# Altium PCB PDC.PcbDoc (part 1 of 3)
Units mil, origin at the board's own origin, x right, y up, seen from the top; angles counter-clockwise.
Board outline 5200.04 x 5000 mil, 4 copper layers (Top Layer, Signal Layer 1, Signal Layer 2, Bottom Layer), stack 30.634 mil thick; 172 components, 174 nets, 838 pads, 390 vias.
Unrouted connection lines stored in the file: 157.
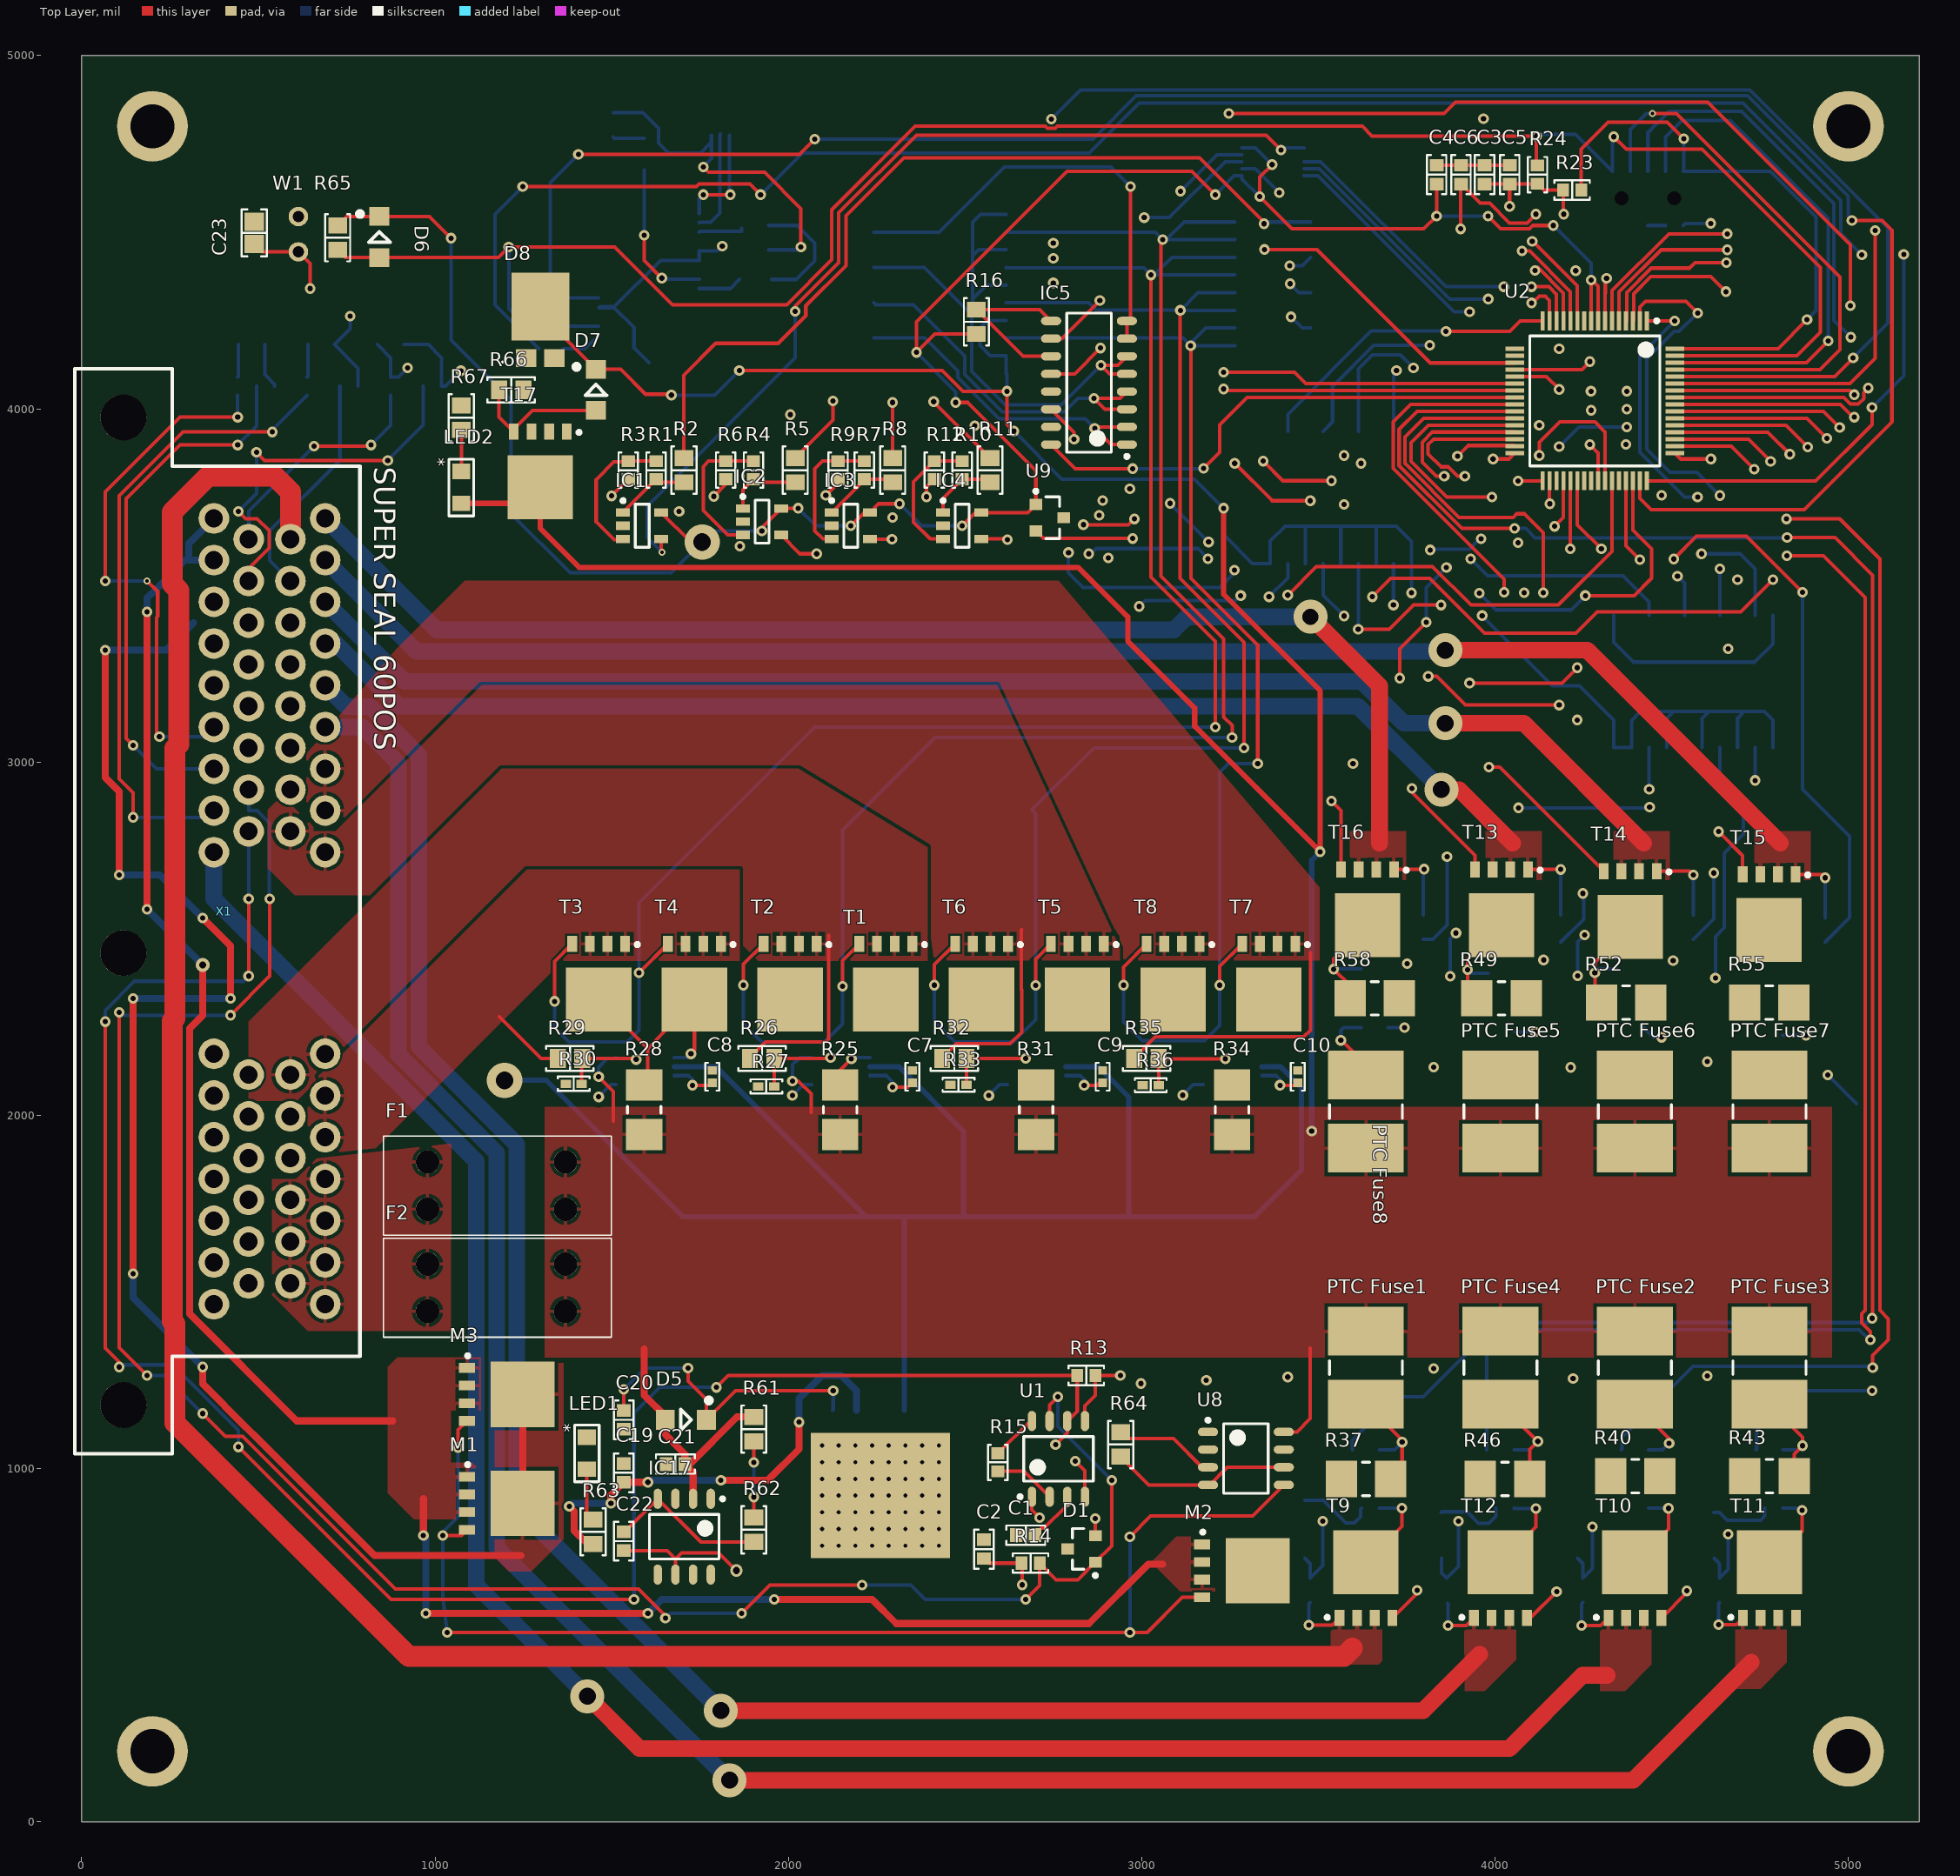
[diagram p0: Top Layer view]
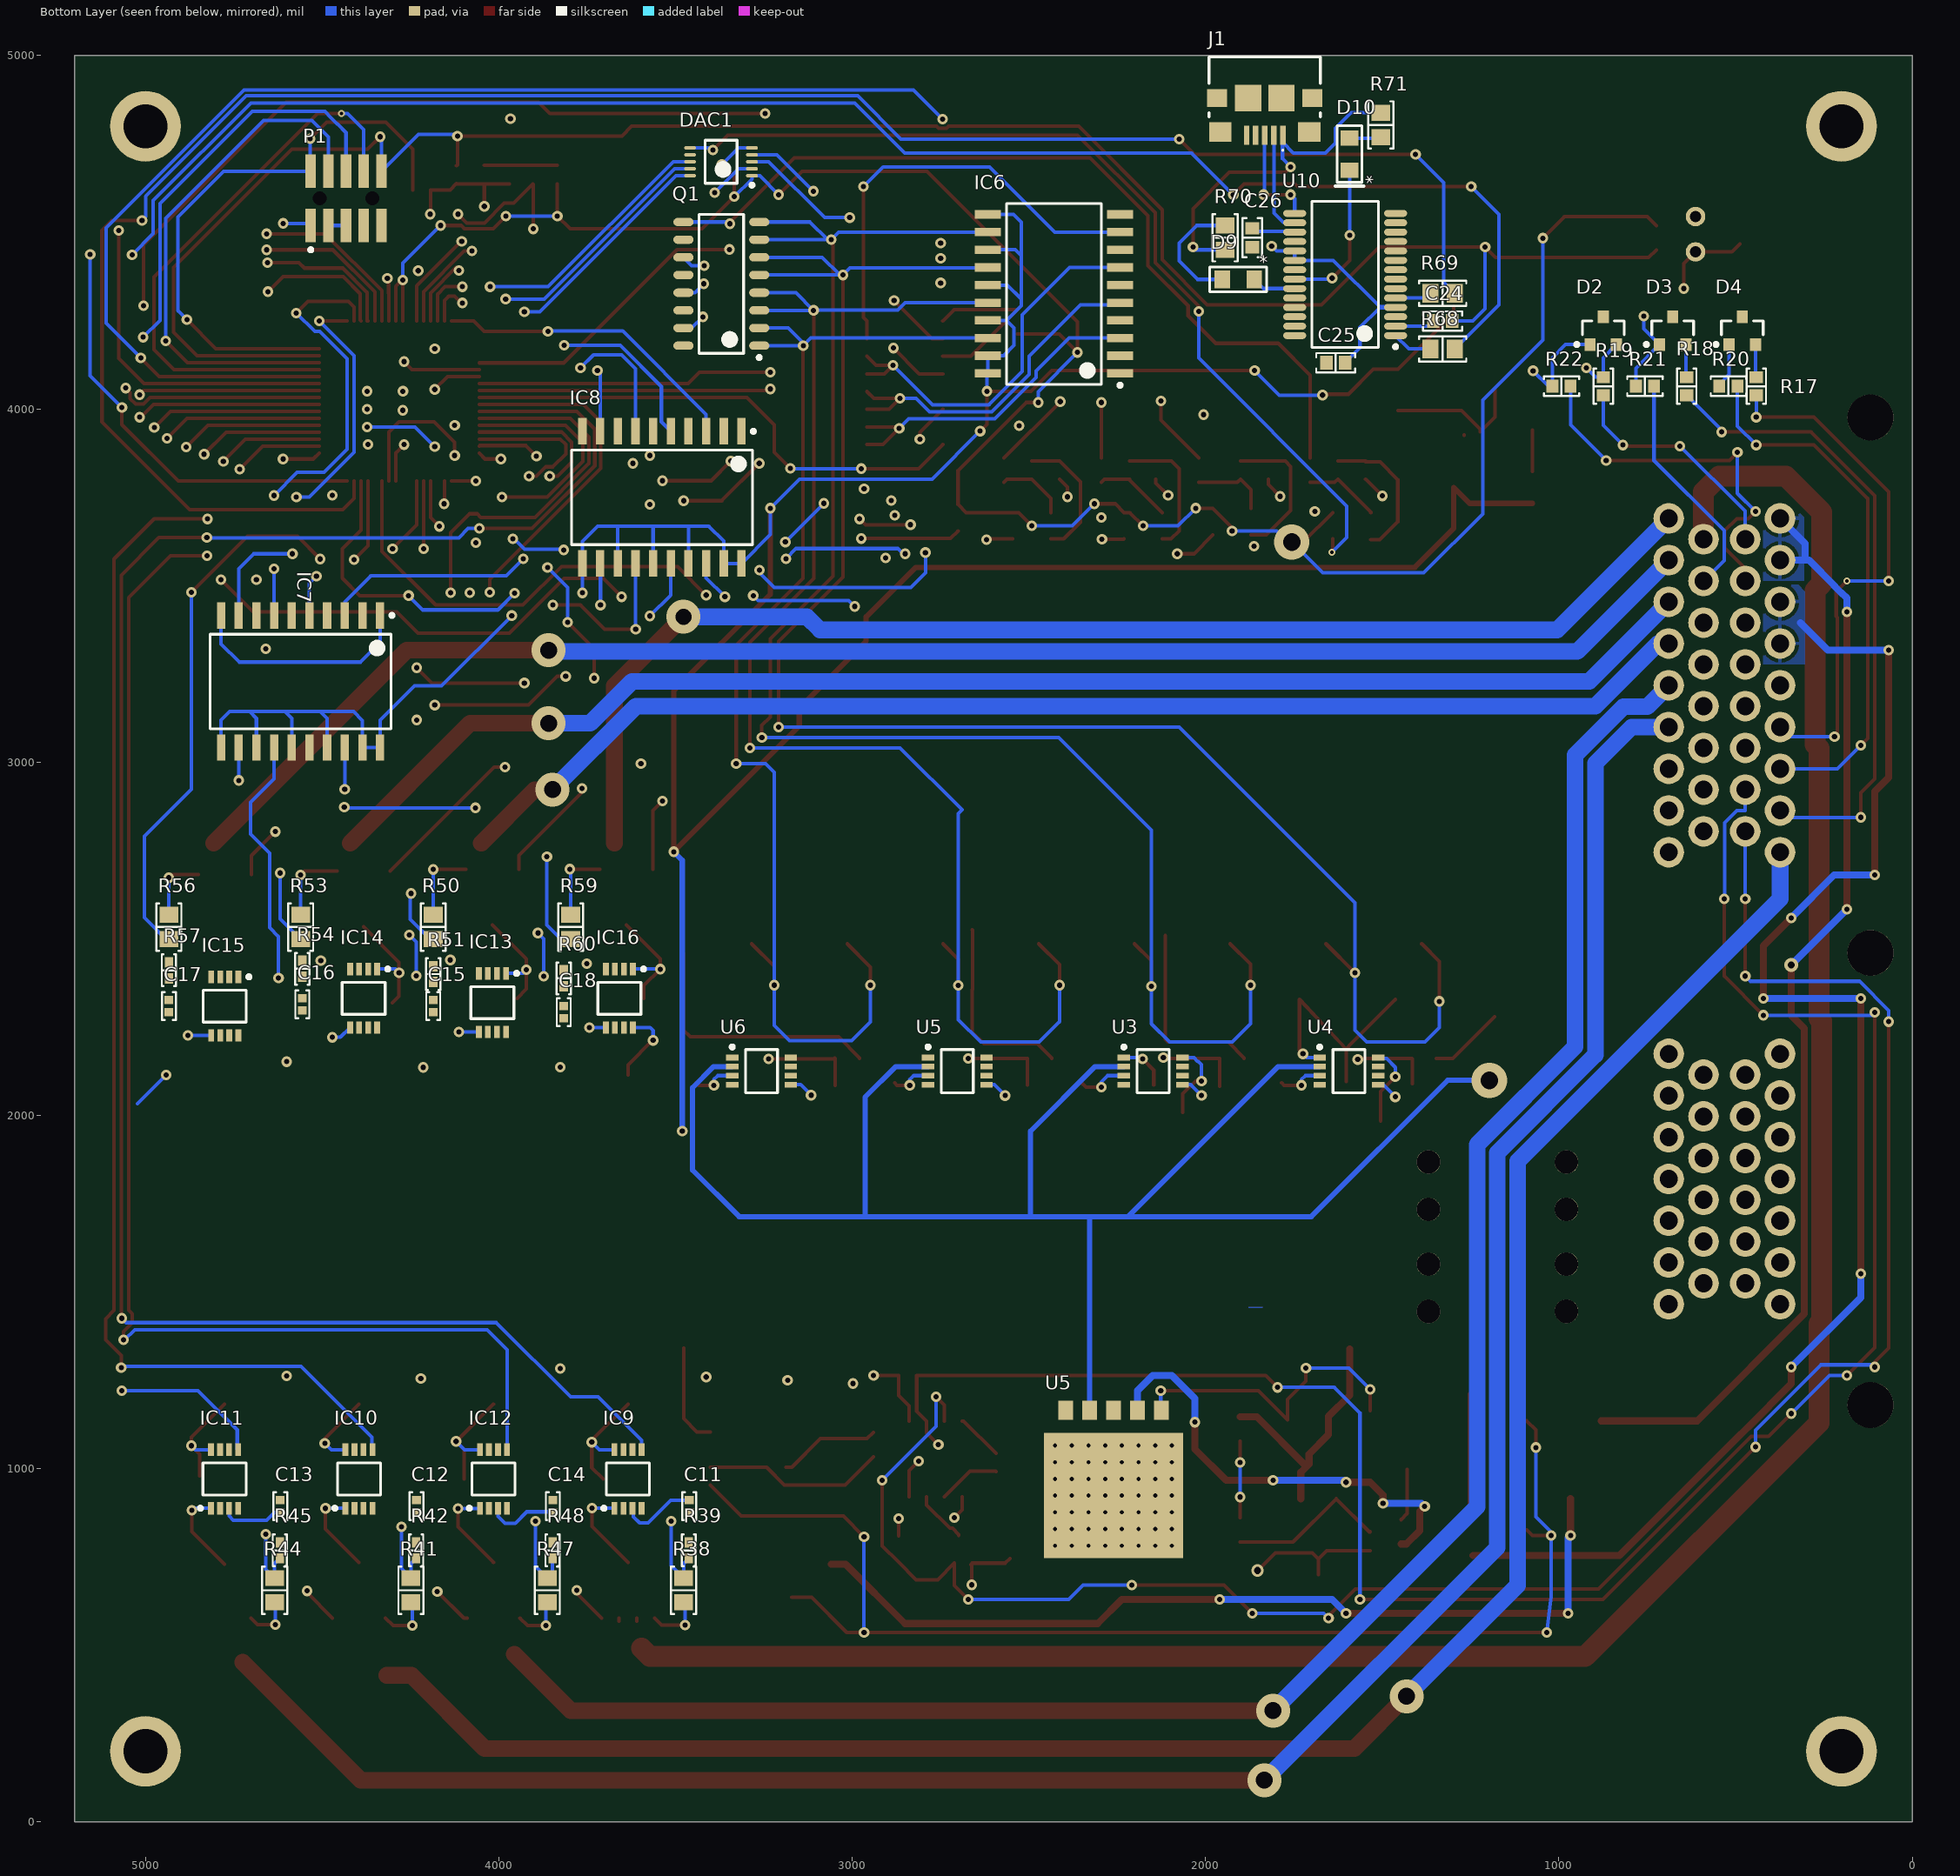
[diagram p1: Bottom Layer view, seen from below]
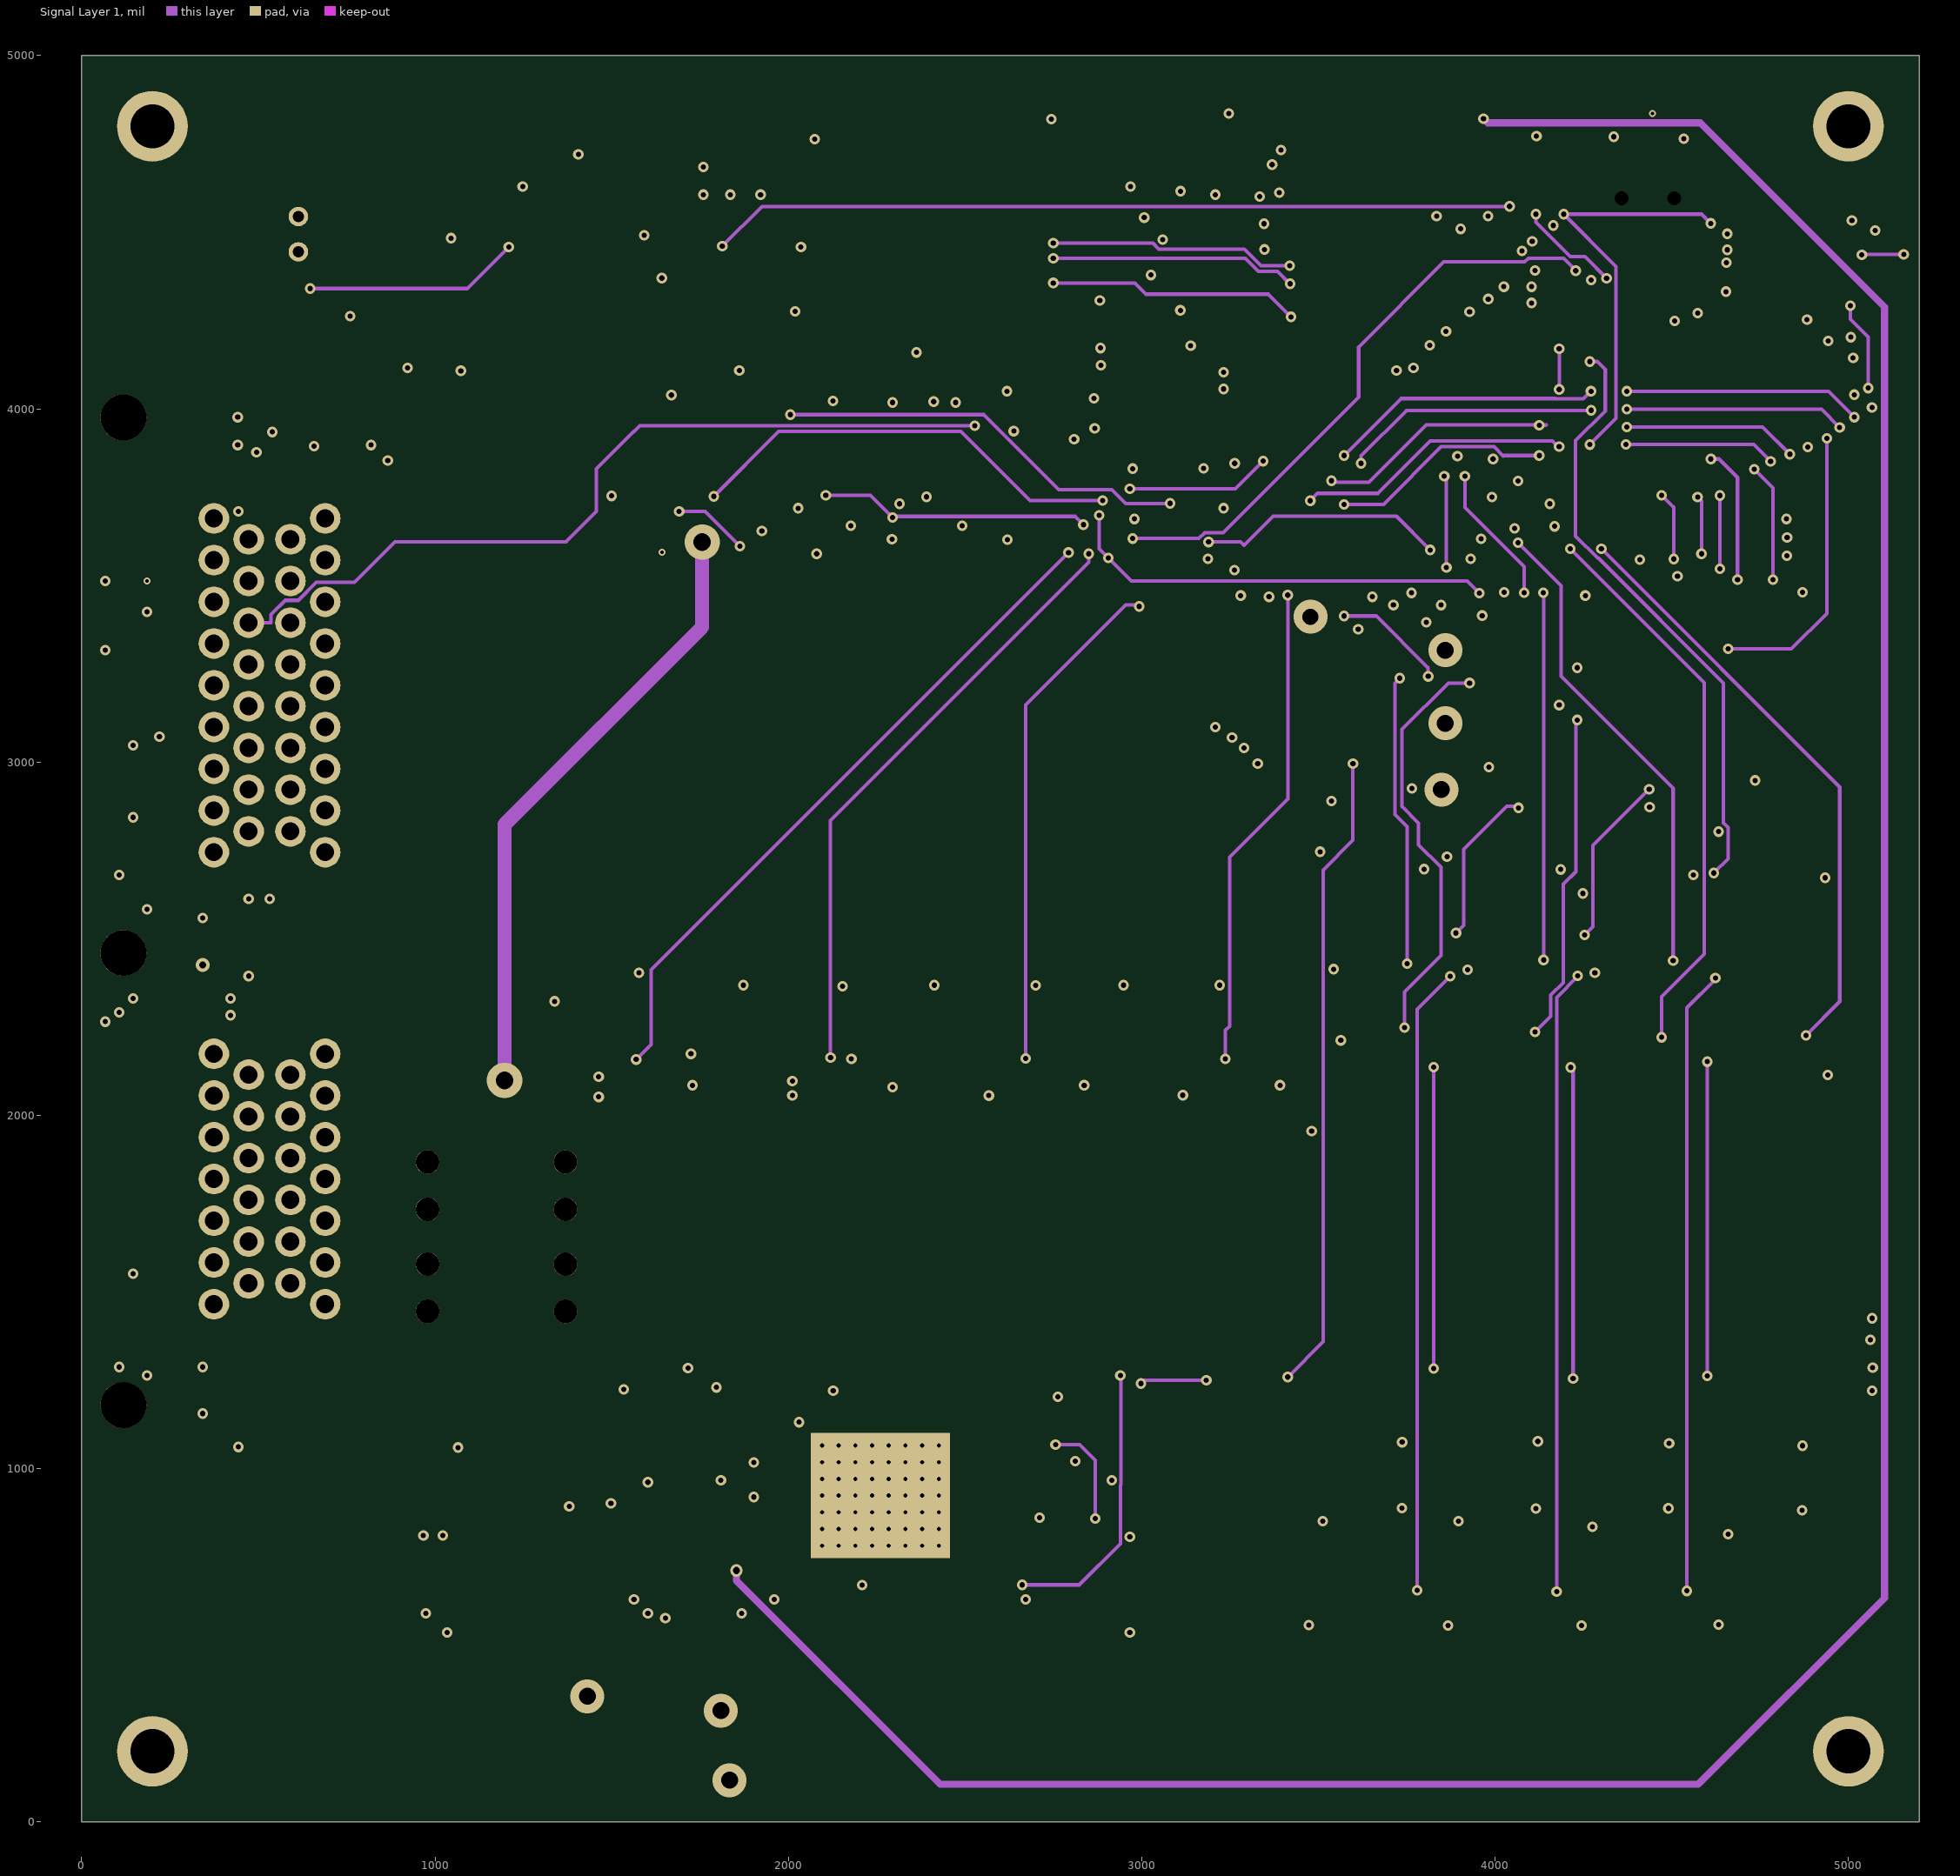
[diagram p2: Signal Layer 1]
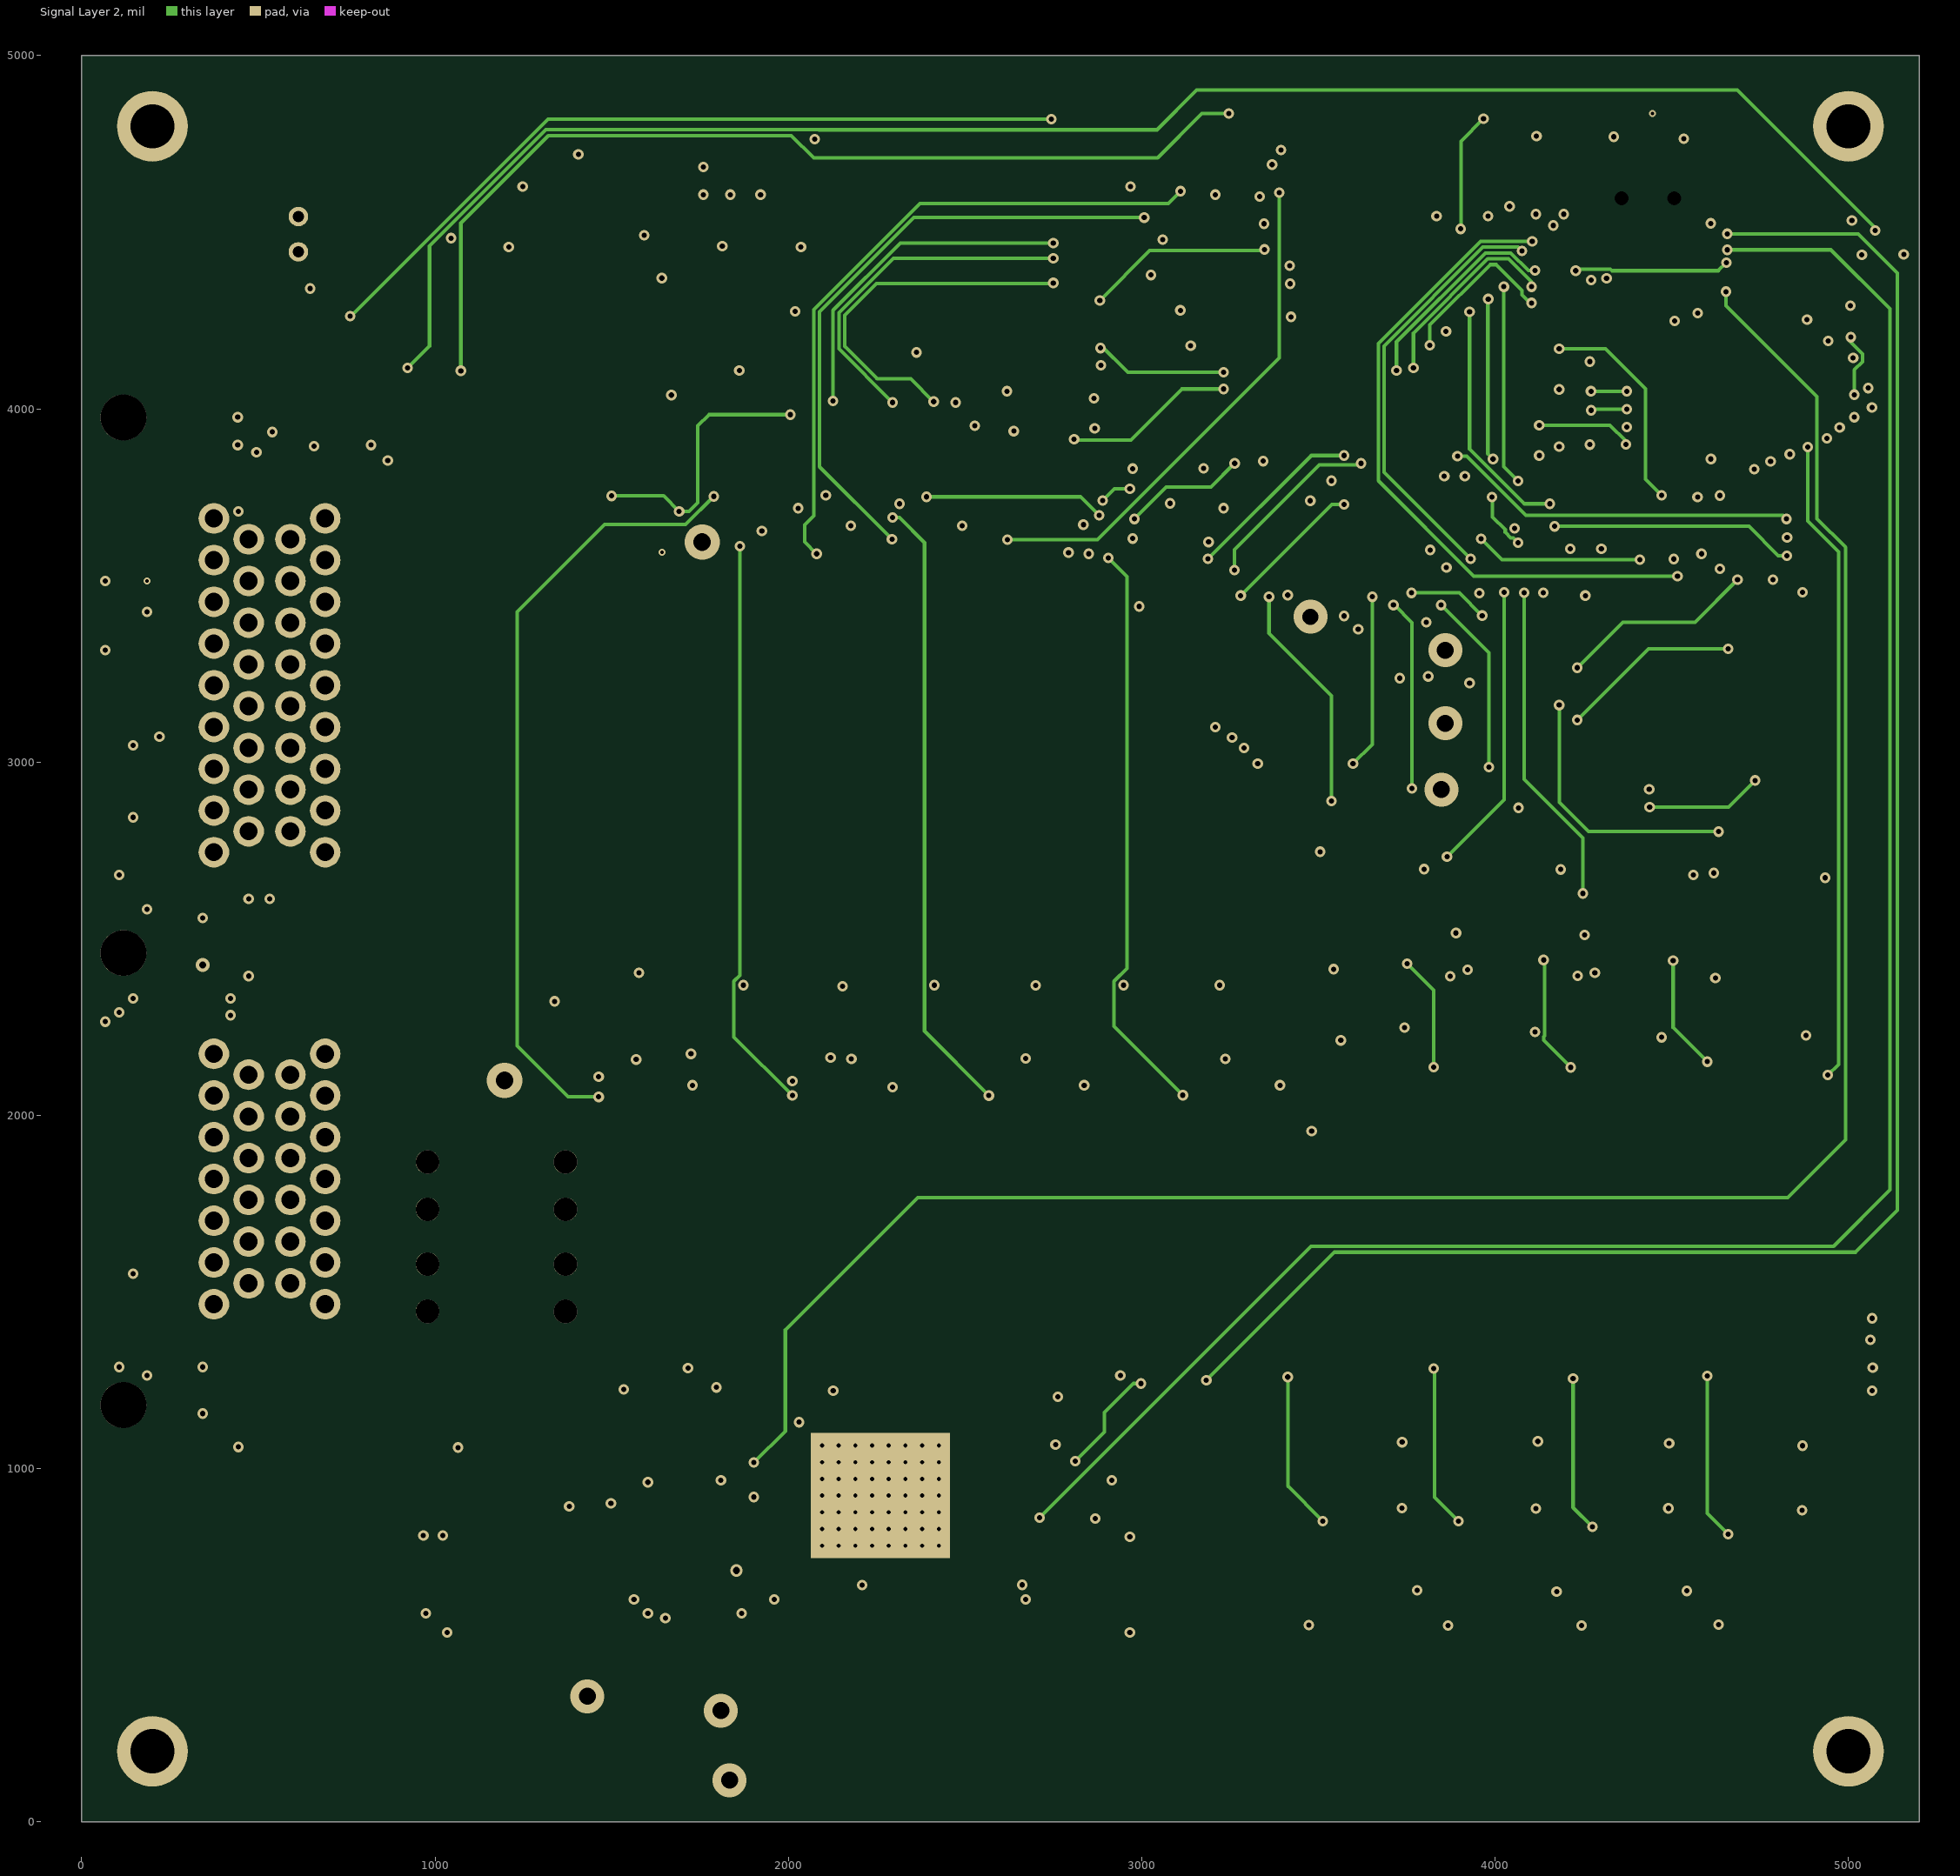
[diagram p3: Signal Layer 2]

## Layer stack, top to bottom
Top Solder: solder mask 0.4, Solder Resist, Dk 3.5
Top Layer: signal copper 1.4
Dielectric 1: core 10, FR-4, Dk 4.2
Signal Layer 1: signal copper 1.417
Dielectric 3: prepreg 5, Dk 4.2
Signal Layer 2: signal copper 1.417
Dielectric 2: core 10, Dk 4.2
Bottom Layer: signal copper 1.4
Bottom Solder: solder mask 0.4, Solder Resist, Dk 3.5

## Board outline
0,0 5200.04,0 5200.04,5000 0,5000

## Design rules (kind name [scope] priority, off if disabled: settings)
Clearance [All] p1: gap=6.5 ignorepadtopadclearanceinfootprint=FALSE except(10: Poly-Poly Poly-Hole)
Height [All] p1: minheight=0 maxheight=3937.01 prefheight=1968.5
PolygonConnect [All] p1: connectstyle=Relief reliefconductorwidth=10 reliefentries=4 polygonreliefangle="90 Angle" airgapwidth=10
RoutingVias [All] p1: holewidth=15 width=30 viastyle="Through Hole" minholewidth=15 minwidth=30 maxholewidth=15 maxwidth=30
SolderMaskExpansion [All] p1: expansion=4
Width [All] p1: maxlimit=787.4 minlimit=10 preferedwidth=10
29 further rules are at their usual default settings.

## Classes and differential pairs
channel class PDC_Low_Current_Outputs: U_PDC_Low_Current_Outputs1 U_PDC_Low_Current_Outputs2 U_PDC_Low_Current_Outputs3 U_PDC_Low_Current_Outputs4 U_PDC_Low_Current_Outputs5 U_PDC_Low_Current_Outputs6 U_PDC_Low_Current_Outputs7 U_PDC_Low_Current_Outputs8
channel class PDC_high_Current_Outputs: U_PDC_high_Current_Outputs1 U_PDC_high_Current_Outputs2 U_PDC_high_Current_Outputs3 U_PDC_high_Current_Outputs4
channel class PDC_Gate_Driver: U_PDC_Gate_Driver1 U_PDC_Gate_Driver2
channel class Analog_HC_Overcurrent_Redundancy: U_Analog_HC_Overcurrent_Redundancy1 U_Analog_HC_Overcurrent_Redundancy2 U_Analog_HC_Overcurrent_Redundancy3 U_Analog_HC_Overcurrent_Redundancy4
component class U_USB: C24 C25 C26 D9 D10 J1 R68 R69 R70 R71 U10
component class U_Temperature_Sensing: U9
component class U_RVP_OVP_HC: D7 D8 LED2 R66 R67 T17
component class U_Reset_Pin: C23 D6 R65 W1
component class U_Rectifier_shutdown_LT1910: R64 U8
component class U_Rectifier_shutdown_Gate: M1 M2 M3
component class U_Power_supply: C19 C20 C21 C22 D5 IC17 LED1 R61 R62 R63 U5
component class U_PDC_Low_Current_Outputs8: C18 IC16 "PTC Fuse8" R58 R59 R60 T16
component class U_PDC_Low_Current_Outputs7: C17 IC15 "PTC Fuse7" R55 R56 R57 T15
component class U_PDC_Low_Current_Outputs6: C16 IC14 "PTC Fuse6" R52 R53 R54 T14
component class U_PDC_Low_Current_Outputs5: C15 IC13 "PTC Fuse5" R49 R50 R51 T13
component class U_PDC_Low_Current_Outputs4: C14 IC12 "PTC Fuse4" R46 R47 R48 T12
component class U_PDC_Low_Current_Outputs3: C13 IC11 "PTC Fuse3" R43 R44 R45 T11
component class U_PDC_Low_Current_Outputs2: C12 IC10 "PTC Fuse2" R40 R41 R42 T10
component class U_PDC_Low_Current_Outputs1: C11 IC9 "PTC Fuse1" R37 R38 R39 T9
component class U_PDC_high_Current_Outputs4: C10 R34 R35 R36 T7 T8 U6
component class U_PDC_high_Current_Outputs3: C9 R31 R32 R33 T5 T6 U5
component class U_PDC_high_Current_Outputs2: C8 R28 R29 R30 T3 T4 U4
component class U_PDC_high_Current_Outputs1: C7 R25 R26 R27 T1 T2 U3
component class U_PDC_Gate_Driver2: IC8
component class U_PDC_Gate_Driver1: IC7
component class U_MCU_MKE185F512VLH16: C3 C4 C5 C6 P1 R23 R24 U2
component class U_Input_Current_Limiting: D2 D3 D4 R17 R18 R19 R20 R21 R22
component class U_Gate_driver: IC6
component class U_E_stop: IC5 R16
component class U_CAN_Tranceiver: C1 C2 D1 R13 R14 R15 U1
component class U_Analog_HC_Overcurrent_Redundancy4: IC4 R10 R11 R12
component class U_Analog_HC_Overcurrent_Redundancy3: IC3 R7 R8 R9
component class U_Analog_HC_Overcurrent_Redundancy2: IC2 R4 R5 R6
component class U_Analog_HC_Overcurrent_Redundancy1: IC1 R1 R2 R3
component class U_Analog_HC_Overcurrent_MMPQ3904: DAC1 Q1
component class PDC: F1 F2

## Components (designator, comment, footprint, x,y, rotation, side; value= is the part's Value field where it differs from the comment)
C1 "Capacitor MLCC 0.10uf 50V CAP 0603/1608" "CAP 0603/1608" 2671.67,811.44 r0 top value=0.10uf (schematic designator C15)
C2 "Capacitor MLCC 4700pf 50V CAP 0603/1608" "CAP 0603/1608" 2553.56,772.07 r270 top value=4700pf (schematic designator C16)
C3 "Capacitor MLCC 0.10uf 16V CAP 0603/1608" "CAP 0603/1608" 3970.44,4663.1 r270 top value=0.10uf (schematic designator C17)
C4 "Capacitor MLCC 0.10uf 25V CAP 0603/1608" "CAP 0603/1608" 3834.26,4663.1 r270 top value=0.10uf (schematic designator C18)
C5 "Capacitor MLCC 100pf 25V CAP 0603/1608" "CAP 0603/1608" 4040.96,4663.1 r270 top value=100pf (schematic designator C19)
C6 "Capacitor MLCC 0.10uf 25V CAP 0603/1608" "CAP 0603/1608" 3903.16,4663.1 r270 top value=0.10uf (schematic designator C20)
C7 "Capacitor MLCC 220pf 16V CAP 0402/1005" "CAP 0402/1005" 2350.76,2109.54 r270 top value=220pf (schematic designator C1)
C8 "Capacitor MLCC 220pf 16V CAP 0402/1005" "CAP 0402/1005" 1784.43,2109.54 r270 top value=220pf (schematic designator C1)
C9 "Capacitor MLCC 220pf 16V CAP 0402/1005" "CAP 0402/1005" 2889.22,2109.54 r270 top value=220pf (schematic designator C1)
C10 "Capacitor MLCC 220pf 16V CAP 0402/1005" "CAP 0402/1005" 3441.61,2109.54 r270 top value=220pf (schematic designator C1)
C11 "Capacitor MLCC 220pf 16V CAP 0402/1005" "CAP 0402/1005" 3461.21,893.6 r90 bottom value=220pf (schematic designator C2)
C12 "Capacitor MLCC 220pf 16V CAP 0402/1005" "CAP 0402/1005" 4232.86,893.6 r270 bottom value=220pf (schematic designator C2)
C13 "Capacitor MLCC 220pf 16V CAP 0402/1005" "CAP 0402/1005" 4618.69,893.6 r270 bottom value=220pf (schematic designator C2)
C14 "Capacitor MLCC 220pf 16V CAP 0402/1005" "CAP 0402/1005" 3847.03,893.6 r270 bottom value=220pf (schematic designator C2)
C15 "Capacitor MLCC 220pf 16V CAP 0402/1005" "CAP 0402/1005" 4185.62,2309.35 r270 bottom value=220pf (schematic designator C2)
C16 "Capacitor MLCC 220pf 16V CAP 0402/1005" "CAP 0402/1005" 4556.09,2314.27 r270 bottom value=220pf (schematic designator C2)
C17 "Capacitor MLCC 220pf 16V CAP 0402/1005" "CAP 0402/1005" 4933.65,2309.35 r90 bottom value=220pf (schematic designator C2)
C18 "Capacitor MLCC 220pf 16V CAP 0402/1005" "CAP 0402/1005" 3816.13,2292.03 r270 bottom value=220pf (schematic designator C2)
C19 "Capacitor MLCC 10uf 16V CAP 0603/1608" "CAP 0603/1608" 1534,988.18 r270 top value=10uf (schematic designator C3)
C20 "Capacitor MLCC 10uf 16V CAP 0603/1608" "CAP 0603/1608" 1534,1138.18 r90 top value=10uf (schematic designator C4)
C21 "Capacitor MLCC 2.2uf 16V CAP 0603/1608" "CAP 0603/1608" 1680.26,1013.18 r0 top value=2.2uf (schematic designator C5)
C22 "Capacitor MLCC 2.2uf 16V CAP 0603/1608" "CAP 0603/1608" 1534,794.68 r270 top value=2.2uf (schematic designator C6)
C23 "Capacitor MLCC 4700pf 25V CAP 0805/2012" "CAP 0805/2012" 488.15,4498.2 r270 top value=4700pf (schematic designator C13)
C24 "Capacitor MLCC 0.10uf 25V CAP 0603/1608" "CAP 0603/1608" 1328.86,4248.4 r180 bottom value=0.10uf (schematic designator C21)
C25 "Capacitor MLCC 0.10uf 25V CAP 0603/1608" "CAP 0603/1608" 1631.58,4130.29 r180 bottom value=0.10uf (schematic designator C22)
C26 "Capacitor MLCC 0.10uf 25V CAP 0603/1608" "CAP 0603/1608" 1867.8,4484.62 r90 bottom value=0.10uf (schematic designator C23)
D1 "NUP1105LT1G" "SOT-23 (TO-236)" 2829.15,772.72 r180 top value=TVS_24V (schematic designator D3)
D2 "AZ23C4V7-7-F Dual Zenner Diodes" SOT23-3 874.49,4221.5 r90 bottom value=4.7V (schematic designator D3)
D3 "AZ23C4V7-7-F Dual Zenner Diodes" SOT23-3 677.64,4221.5 r90 bottom value=4.7V (schematic designator D4)
D4 "AZ23C4V7-7-F Dual Zenner Diodes" SOT23-3 480.79,4221.5 r90 bottom value=4.7V (schematic designator D5)
D5 "DIODE" SOD123F 1709.79,1138.18 r0 top value=1A (schematic designator D1)
D6 "DIODE" SOD123F 842.48,4486.39 r90 top
D7 "DDZ9701-7" SOD123F 1455.32,4053.94 r90 top value=14Vz
D8 "DIODE_2A1K" TO-277 1297.84,4253.58 r90 top value="20 A"
D9 "" 0805_LED 1907.17,4366.51 r180 bottom value=Green (schematic designator D4)
D10 "" 0805_LED 1592.21,4720.84 r270 bottom value=Red (schematic designator D5)
DAC1 "LED" "MSOP10 (RM-10)" 3371.18,4699.38 r0 bottom value=10bit
F1 "Fuse" 3568-MiniFuseHolder 1173.81,1801.08 r180 top
F2 "Fuse" 3568-MiniFuseHolder 1173.81,1512.11 r180 top
IC1 "Op-Amp LT1716" SOT23-5 1586.22,3669.07 r0 top
IC2 "Op-Amp LT1716" SOT23-5 1925.12,3680.7 r0 top (schematic designator IC1)
IC3 "Op-Amp LT1716" SOT23-5 2176.77,3669.07 r0 top (schematic designator IC1)
IC4 "Op-Amp LT1716" SOT23-5 2491.73,3669.07 r0 top (schematic designator IC1)
IC5 "MMPQ3906 PNP General Purpose Amp" SOIC-16-NB 2850.65,4073.88 r180 top (schematic designator IC2)
IC6 "LT1161ISWPBF MOSFET Driver" SO-20 2428.94,4325.43 r0 bottom (schematic designator IC3)
IC7 "LT1161ISWPBF MOSFET Driver" SO-20 4560.93,3228.35 r270 bottom (schematic designator IC4)
IC8 "LT1161ISWPBF MOSFET Driver" SO-20 3538.19,3749.51 r270 bottom (schematic designator IC4)
IC9 "LT6100HMS8PBF Current Sense Amp" MSOP-8 3634.44,970.77 r90 bottom (schematic designator IC5)
IC10 "LT6100HMS8PBF Current Sense Amp" MSOP-8 4395.59,970.77 r90 bottom (schematic designator IC5)
IC11 "LT6100HMS8PBF Current Sense Amp" MSOP-8 4776.17,970.77 r90 bottom (schematic designator IC5)
IC12 "LT6100HMS8PBF Current Sense Amp" MSOP-8 4015.01,970.77 r90 bottom (schematic designator IC5)
IC13 "LT6100HMS8PBF Current Sense Amp" MSOP-8 4018.03,2319.19 r270 bottom (schematic designator IC5)
IC14 "LT6100HMS8PBF Current Sense Amp" MSOP-8 4382.47,2331.4 r270 bottom (schematic designator IC5)
IC15 "LT6100HMS8PBF Current Sense Amp" MSOP-8 4775.58,2309.35 r270 bottom (schematic designator IC5)
IC16 "LT6100HMS8PBF Current Sense Amp" MSOP-8 3658.65,2331.4 r270 bottom (schematic designator IC5)
IC17 "MAX6350CSA+ 5V" SOIC-8 1705.26,807.47 r270 top value=5V (schematic designator IC6)
J1 "1981568-1" TECO-1981568-5_V 1832.42,4774.46 r0 bottom value=CONN
LED1 "LED" 0805_LED 1429.67,1043.69 r90 top value=Green
LED2 "LED" 0805_LED 1074.41,3777.72 r90 top value=Green
M1 "PSMN2R2-25YLC 25V Logic Level MOSFET" LFPAK-SO8 1196.81,901.96 r0 top value=N_Channel
M2 "PSMN2R2-25YLC 25V Logic Level MOSFET" LFPAK-SO8 3276.9,710.73 r0 top value=N_Channel
M3 "PSMN2R2-25YLC 25V Logic Level MOSFET" LFPAK-SO8 1196.81,1210.12 r0 top value=N_Channel
P1 "5103309-1" HDR2X5_SMT 4432.32,4595.96 r180 bottom value=CONN
"PTC Fuse1" "PTC Fuse" "PTC Fuse 2920/07351" 3634.44,1285.73 r90 top
"PTC Fuse2" "PTC Fuse" "PTC Fuse 2920/07351" 4395.59,1285.73 r90 top (schematic designator "PTC Fuse1")
"PTC Fuse3" "PTC Fuse" "PTC Fuse 2920/07351" 4776.17,1285.73 r90 top (schematic designator "PTC Fuse1")
"PTC Fuse4" "PTC Fuse" "PTC Fuse 2920/07351" 4015.01,1285.73 r90 top (schematic designator "PTC Fuse1")
"PTC Fuse5" "PTC Fuse" "PTC Fuse 2920/07351" 4015.01,2010.73 r270 top (schematic designator "PTC Fuse1")
"PTC Fuse6" "PTC Fuse" "PTC Fuse 2920/07351" 4395.59,2010.73 r270 top (schematic designator "PTC Fuse1")
"PTC Fuse7" "PTC Fuse" "PTC Fuse 2920/07351" 4776.17,2010.73 r270 top (schematic designator "PTC Fuse1")
"PTC Fuse8" "PTC Fuse" "PTC Fuse 2920/07351" 3634.44,2010.73 r270 top (schematic designator "PTC Fuse1")
Q1 "MMPQ3904" SOIC-16-NB 3370.2,4353.91 r0 bottom
R1 "Resistor 10k 0603 1/10W 1%" "RES 0603/1608" 1625.59,3826.55 r270 top value=10k
R2 "Resistor 10k 0805 1/10W 1%" "RES 0805/2012" 1704.33,3826.55 r90 top value=10k
R3 "Resistor 3.0k 0603 1/10W 1%" "RES 0603/1608" 1546.85,3826.55 r90 top value=3.0k
R4 "Resistor 10k 0603 1/10W 1%" "RES 0603/1608" 1901.18,3826.55 r270 top value=10k (schematic designator R1)
R5 "Resistor 10k 0805 1/10W 1%" "RES 0805/2012" 2019.29,3826.55 r90 top value=10k (schematic designator R2)
R6 "Resistor 3.0k 0603 1/10W 1%" "RES 0603/1608" 1822.44,3826.55 r90 top value=3.0k (schematic designator R3)
R7 "Resistor 10k 0603 1/10W 1%" "RES 0603/1608" 2214.98,3826.55 r270 top value=10k (schematic designator R1)
R8 "Resistor 10k 0805 1/10W 1%" "RES 0805/2012" 2294.88,3826.55 r90 top value=10k (schematic designator R2)
R9 "Resistor 3.0k 0603 1/10W 1%" "RES 0603/1608" 2140.36,3826.55 r90 top value=3.0k (schematic designator R3)
R10 "Resistor 10k 0603 1/10W 1%" "RES 0603/1608" 2491.73,3826.55 r270 top value=10k (schematic designator R1)
R11 "Resistor 10k 0805 1/10W 1%" "RES 0805/2012" 2570.47,3826.55 r90 top value=10k (schematic designator R2)
R12 "Resistor 3.0k 0603 1/10W 1%" "RES 0603/1608" 2412.99,3826.55 r90 top value=3.0k (schematic designator R3)
R13 "Resistor 62 0603 1/10W 5%" "RES 0603/1608" 2842.93,1263.87 r0 top value=62 (schematic designator R23)
R14 "Resistor 62 0603 1/10W 5%" "RES 0603/1608" 2685.45,732.7 r0 top value=62 (schematic designator R24)
R15 "Resistor 100 0603 1/10W 10%" "RES 0603/1608" 2592.93,1017.8 r90 top value=100 (schematic designator R25)
R16 "Resistor 10k 0805 1/10W 1%" "RES 0805/2012" 2532.01,4246.43 r270 top value=10k (schematic designator R4)
R17 "Resistor 2.2k 0603 1/10W 1%" "RES 0603/1608" 441.42,4064.02 r270 bottom value=2.2k (schematic designator R18)
R18 "Resistor 2.2k 0603 1/10W 1%" "RES 0603/1608" 638.27,4064.02 r270 bottom value=2.2k (schematic designator R19)
R19 "Resistor 2.2k 0603 1/10W 1%" "RES 0603/1608" 874.49,4064.02 r270 bottom value=2.2k (schematic designator R20)
R20 "Resistor 2.2k 0603 1/10W 1%" "RES 0603/1608" 520.16,4064.02 r180 bottom value=2.2k (schematic designator R21)
R21 "Resistor 2.2k 0603 1/10W 1%" "RES 0603/1608" 756.38,4064.02 r180 bottom value=2.2k (schematic designator R22)
R22 "Resistor 2.2k 0603 1/10W 1%" "RES 0603/1608" 992.6,4064.02 r180 bottom value=2.2k (schematic designator R23)
R23 "Resistor 10k 0603 1/10W 1%" "RES 0603/1608" 4218.12,4619.58 r180 top value=10k (schematic designator R26)
R24 "Resistor 10k 0603 1/10W 5%" "RES 0603/1608" 4119.7,4663.1 r270 top value=10k (schematic designator R27)
R25 "Resistor .002 2010 1.5W 1%" "RES 2010/5025" 2146.41,2016.04 r270 top value=.002 (schematic designator R5)
R26 "Resistor 27k 0805 1/10W 10%" "RES 0805/2012" 1925.56,2161.25 r180 top value=27k (schematic designator R6)
R27 "Resistor 10k 0402 1/10W 1%" "RES 0402/1005" 1937.55,2081.99 r0 top value=10k (schematic designator R7)
R28 "Resistor .002 2010 1.5W 1%" "RES 2010/5025" 1591.8,2016.04 r270 top value=.002 (schematic designator R5)
R29 "Resistor 27k 0805 1/10W 10%" "RES 0805/2012" 1381.61,2161.25 r180 top value=27k (schematic designator R6)
R30 "Resistor 10k 0402 1/10W 1%" "RES 0402/1005" 1392.36,2089.62 r0 top value=10k (schematic designator R7)
R31 "Resistor .002 2010 1.5W 1%" "RES 2010/5025" 2701.02,2016.04 r270 top value=.002 (schematic designator R5)
R32 "Resistor 27k 0805 1/10W 10%" "RES 0805/2012" 2469.52,2161.25 r180 top value=27k (schematic designator R6)
R33 "Resistor 10k 0402 1/10W 1%" "RES 0402/1005" 2481.33,2086.61 r0 top value=10k (schematic designator R7)
R34 "Resistor .002 2010 1.5W 1%" "RES 2010/5025" 3255.63,2016.04 r270 top value=.002 (schematic designator R5)
R35 "Resistor 27k 0805 1/10W 10%" "RES 0805/2012" 3013.47,2161.25 r180 top value=27k (schematic designator R6)
R36 "Resistor 10k 0402 1/10W 1%" "RES 0402/1005" 3025.28,2085.3 r0 top value=10k (schematic designator R7)
R37 "Resistor .02 2010 1W 1%" "RES 2010/5025" 3634.44,970.77 r0 top value=.02 (schematic designator R8)
R38 "Resistor 27k 0805 1/10W 10%" "RES 0805/2012" 3476.96,655.81 r270 bottom value=27k (schematic designator R9)
R39 "Resistor 10k 0402 1/10W 1%" "RES 0402/1005" 3462.19,768.8 r270 bottom value=10k (schematic designator R10)
R40 "Resistor .02 2010 1W 1%" "RES 2010/5025" 4396.84,978.96 r0 top value=.02 (schematic designator R8)
R41 "Resistor 27k 0805 1/10W 10%" "RES 0805/2012" 4248.61,655.81 r270 bottom value=27k (schematic designator R9)
R42 "Resistor 10k 0402 1/10W 1%" "RES 0402/1005" 4233.85,768.8 r270 bottom value=10k (schematic designator R10)
R43 "Resistor .02 2010 1W 1%" "RES 2010/5025" 4776.17,978.96 r0 top value=.02 (schematic designator R8)
R44 "Resistor 27k 0805 1/10W 10%" "RES 0805/2012" 4634.44,655.81 r270 bottom value=27k (schematic designator R9)
R45 "Resistor 10k 0402 1/10W 1%" "RES 0402/1005" 4619.67,768.8 r270 bottom value=10k (schematic designator R10)
R46 "Resistor .02 2010 1W 1%" "RES 2010/5025" 4028.14,970.77 r0 top value=.02 (schematic designator R8)
R47 "Resistor 27k 0805 1/10W 10%" "RES 0805/2012" 3862.78,655.81 r270 bottom value=27k (schematic designator R9)
R48 "Resistor 10k 0402 1/10W 1%" "RES 0402/1005" 3848.02,768.8 r270 bottom value=10k (schematic designator R10)
R49 "Resistor .02 2010 1W 1%" "RES 2010/5025" 4018.03,2331.4 r0 top value=.02 (schematic designator R8)
R50 "Resistor 27k 0805 1/10W 10%" "RES 0805/2012" 4185.62,2533.17 r90 bottom value=27k (schematic designator R9)
R51 "Resistor 10k 0402 1/10W 1%" "RES 0402/1005" 4185.62,2399.9 r90 bottom value=10k (schematic designator R10)
R52 "Resistor .02 2010 1W 1%" "RES 2010/5025" 4370.59,2319.19 r0 top value=.02 (schematic designator R8)
R53 "Resistor 27k 0805 1/10W 10%" "RES 0805/2012" 4560.62,2533.17 r90 bottom value=27k (schematic designator R9)
R54 "Resistor 10k 0402 1/10W 1%" "RES 0402/1005" 4556.09,2415.06 r90 bottom value=10k (schematic designator R10)
R55 "Resistor .02 2010 1W 1%" "RES 2010/5025" 4775.58,2319.19 r0 top value=.02 (schematic designator R8)
R56 "Resistor 27k 0805 1/10W 10%" "RES 0805/2012" 4933.65,2533.17 r90 bottom value=27k (schematic designator R9)
R57 "Resistor 10k 0402 1/10W 1%" "RES 0402/1005" 4933.65,2410.73 r90 bottom value=10k (schematic designator R10)
R58 "Resistor .02 2010 1W 1%" "RES 2010/5025" 3659.44,2331.4 r0 top value=.02 (schematic designator R8)
R59 "Resistor 27k 0805 1/10W 10%" "RES 0805/2012" 3796.44,2533.17 r90 bottom value=27k (schematic designator R9)
R60 "Resistor 10k 0402 1/10W 1%" "RES 0402/1005" 3816.13,2388.09 r90 bottom value=10k (schematic designator R10)
R61 "Resistor 39k 0805 1/10W 10%" "RES 0805/2012" 1902.11,1112 r90 top value=39k (schematic designator R11)
R62 "Resistor 10k 0805 1/4W 10%" "RES 0805/2012" 1902.11,826.96 r90 top value=10k (schematic designator R12)
R63 "Resistor 1.0k 0805 1/10W 10%" "RES 0805/2012" 1446.99,821.25 r90 top value=1.0k (schematic designator R13)
R64 "Resistance" "RES 0805/2012" 2940.29,1068.33 r90 top value=14.7K (schematic designator R14)
R65 "Resistor 100k 0805 1/10W 1%" "RES 0805/2012" 724.37,4484.42 r90 top value=100k (schematic designator R26)
R66 "Resistor 47k 0805 1/10W 1%" "RES 0805/2012" 1215.36,4053.94 r180 top value=47k (schematic designator R27)
R67 "Resistor 470 0805 1/10W 1%" "RES 0805/2012" 1074.41,3974.57 r270 top value=470 (schematic designator R28)
R68 "Resistor 1.0k 0805 1/4W 1%" "RES 0805/2012" 1328.86,4169.66 r180 bottom value=1.0k (schematic designator R28)
R69 "Resistor 1.0k 0805 1/4W 1%" "RES 0805/2012" 1328.86,4327.14 r180 bottom value=1.0k (schematic designator R29)
R70 "Resistor 1.0k 0805 1/4W 1%" "RES 0805/2012" 1944.57,4484.62 r270 bottom value=1.0k (schematic designator R30)
R71 "Resistor 1.0k 0805 1/4W 1%" "RES 0805/2012" 1504.06,4803.73 r90 bottom value=1.0k (schematic designator R31)
T1 "PSMN2R2-25YLC 25V Logic Level MOSFET" LFPAK-SO8 2275.76,2379.23 r270 top value=N_Channel
T2 "PSMN2R2-25YLC 25V Logic Level MOSFET" LFPAK-SO8 2004.86,2379.23 r270 top value=N_Channel
T3 "PSMN2R2-25YLC 25V Logic Level MOSFET" LFPAK-SO8 1463.06,2379.23 r270 top value=N_Channel (schematic designator T1)
T4 "PSMN2R2-25YLC 25V Logic Level MOSFET" LFPAK-SO8 1733.96,2379.23 r270 top value=N_Channel (schematic designator T2)
T5 "PSMN2R2-25YLC 25V Logic Level MOSFET" LFPAK-SO8 2817.57,2379.23 r270 top value=N_Channel (schematic designator T1)
T6 "PSMN2R2-25YLC 25V Logic Level MOSFET" LFPAK-SO8 2546.67,2379.23 r270 top value=N_Channel (schematic designator T2)
T7 "PSMN2R2-25YLC 25V Logic Level MOSFET" LFPAK-SO8 3359.37,2379.23 r270 top value=N_Channel (schematic designator T1)
T8 "PSMN2R2-25YLC 25V Logic Level MOSFET" LFPAK-SO8 3088.47,2379.23 r270 top value=N_Channel (schematic designator T2)
T9 "PSMN2R2-25YLC 25V Logic Level MOSFET" LFPAK-SO8 3634.44,683.37 r90 top value=N_Channel (schematic designator T3)
T10 "PSMN2R2-25YLC 25V Logic Level MOSFET" LFPAK-SO8 4395.59,683.37 r90 top value=N_Channel (schematic designator T3)
T11 "PSMN2R2-25YLC 25V Logic Level MOSFET" LFPAK-SO8 4776.17,683.37 r90 top value=N_Channel (schematic designator T3)
T12 "PSMN2R2-25YLC 25V Logic Level MOSFET" LFPAK-SO8 4015.01,683.37 r90 top value=N_Channel (schematic designator T3)
T13 "PSMN2R2-25YLC 25V Logic Level MOSFET" LFPAK-SO8 4018.03,2589.86 r270 top value=N_Channel (schematic designator T3)
T14 "PSMN2R2-25YLC 25V Logic Level MOSFET" LFPAK-SO8 4382.47,2584.94 r270 top value=N_Channel (schematic designator T3)
T15 "PSMN2R2-25YLC 25V Logic Level MOSFET" LFPAK-SO8 4775.58,2576.08 r270 top value=N_Channel (schematic designator T3)
T16 "PSMN2R2-25YLC 25V Logic Level MOSFET" LFPAK-SO8 3638.96,2589.86 r270 top value=N_Channel (schematic designator T3)
T17 "PSMN2R2-25YLC 25V Logic Level MOSFET" LFPAK-SO8 1297.84,3828.9 r270 top value=N_Channel (schematic designator T4)
U1 "MCP2561 CAN Transceiver" SOIC-8 2764.19,1027.64 r90 top value=CAN/UART (schematic designator U2)
U2 "" TQFP64 4281.89,4022.61 r270 top (schematic designator U3)
U3 "LT6100HMS8PBF Current Sense Amp" MSOP-8 2148.23,2125.3 r180 bottom (schematic designator U1)
U4 "LT6100HMS8PBF Current Sense Amp" MSOP-8 1594.1,2125.3 r180 bottom (schematic designator U1)
U5 "BA50DD0WHFP-TR Linear Voltage Regulators 5" HRP5 2260.37,923.81 r0 bottom value=5V
U5 "LT6100HMS8PBF Current Sense Amp" MSOP-8 2702.35,2125.3 r180 bottom (schematic designator U1)
U6 "LT6100HMS8PBF Current Sense Amp" MSOP-8 3256.47,2125.3 r180 bottom (schematic designator U1)
U8 "LT1910" SOIC-8 3294.62,1028.96 r0 top (schematic designator U3)
U9 "MCP970x" SOT23-3 2739.68,3692 r0 top (schematic designator U6)
U10 "FT232RL" SSOP-28 1604.81,4380.48 r0 bottom (schematic designator U4)
W1 "Jumper" XG8T-0231 613.16,4544.46 r270 top
X1 "3-6437285-2" "SUPERSEAL 60POS 90Deg" 118.11,3975.44 r270 top value=CONN

## Footprints (in the part's own frame and the unit in brackets; to place one, negate y for a bottom-side part, rotate by r counter-clockwise, add the part's x,y. Pads: shape width x height; smd on the part's side, far side on the other; paste and mask are expansions set on the pad)
0805_LED [mm]
  rect 1.1x1.3 smd: 1(-1.15,0) 2(1.15,0)
  silkscreen extent -2.06,-0.89 2.03,0.89, body extent -1.05,-0.67 1.05,0.68, height 0.9
3568-MiniFuseHolder [mm] "3568 Mini Fuse Holder"
  round 1.7 hole 1.7: 1(-4.96,-1.7) 1(-4.96,1.7) 2(4.96,-1.7) 2(4.96,1.7)
  silkscreen extent -8.25,-3.56 8.13,3.56, body extent -8,-4.19 8,3.38, height 16.17
"CAP 0402/1005" [mm] "Chip Capacitor, 2-Leads, Body 1.02x0.51mm, IPC Medium Density"
  rect 0.6x0.64 smd: 1(-0.44,0) 2(0.44,0)
  silkscreen extent -1,-0.5 1,0.5, body extent -0.5,-0.26 0.5,0.26, height 0.52
"CAP 0603/1608" [mm] "Chip Capacitor, 2-Leads, Body 1.60x0.80mm, IPC Medium Density"
  rect 0.9x1 smd: 1(-0.675,0) 2(0.675,0)
  silkscreen extent -1.4,-0.7 1.4,0.7, body extent -0.8,-0.41 0.8,0.41, height 0.82
"CAP 0805/2012" [mm] "Chip Capacitor, 2-Leads, Body 2.00x1.20mm, IPC Medium Density"
  rect 1.3x1.4 smd: 1(-0.8,0) 2(0.8,0)
  silkscreen extent -1.7,-0.9 1.7,0.9, body extent -1,-0.64 1,0.64, height 1.26
HDR2X5_SMT [mm] "Header, 10-Leads, Body 3.43x6.35mm, Pitch 1.27mm"
  rect 0.76x2.4 smd: 1(-2.54,-1.95) 2(-2.54,1.95) 3(-1.27,-1.95) 4(-1.27,1.95) 5(0,-1.95) 6(0,1.95) 7(1.27,-1.95) 8(1.27,1.95) 9(2.54,-1.95) 10(2.54,1.95)
  round 0 hole 1 unplated: MH1(-1.905,0) MH2(1.905,0)
  silkscreen extent -2.67,-3.82 -2.42,-3.58, body extent -3.18,-1.72 3.18,1.72, height 4.55
HRP5 [mm]
  rect 1.07x1.37 smd: 1(-3.44,-6.125) 2(-1.72,-6.125) 3(0,-6.125) 4(1.72,-6.125) 5(3.44,-6.125)
  rect 10x9 all layers, no hole: 6(0,0)
  round 0.3 hole 0.3: hole(-4.2,-3.6) hole(-4.2,-2.4) hole(-4.2,-1.2) hole(-4.2,0) hole(-4.2,1.2) hole(-4.2,2.4) hole(-4.2,3.6) hole(-3,-3.6) hole(-3,-2.4) hole(-3,-1.2) hole(-3,0) hole(-3,1.2) hole(-3,2.4) hole(-3,3.6) hole(-1.8,-3.6) hole(-1.8,-2.4) hole(-1.8,-1.2) hole(-1.8,0) hole(-1.8,1.2) hole(-1.8,2.4) hole(-1.8,3.6) hole(-0.6,-3.6) hole(-0.6,-2.4) hole(-0.6,-1.2) hole(-0.6,0) hole(-0.6,1.2) hole(-0.6,2.4) hole(-0.6,3.6) hole(0.6,-3.6) hole(0.6,-2.4) hole(0.6,-1.2) hole(0.6,0) hole(0.6,1.2) hole(0.6,2.4) hole(0.6,3.6) hole(1.8,-3.6) hole(1.8,-2.4) hole(1.8,-1.2) hole(1.8,0) hole(1.8,1.2) hole(1.8,2.4) hole(1.8,3.6) hole(3,-3.6) hole(3,-2.4) hole(3,-1.2) hole(3,0) hole(3,1.2) hole(3,2.4) hole(3,3.6) hole(4.2,-3.6) hole(4.2,-2.4) hole(4.2,-1.2) hole(4.2,0) hole(4.2,1.2) hole(4.2,2.4) hole(4.2,3.6)
  body extent -4.75,-4.44 4.7,4.45, height 1.9
LFPAK-SO8 [mm] "TO, 5-Pads, Body 5.15x5.86mm (max), IPC Low Density"
  rect 1.15x0.7 smd: 1(-2.7,1.905) 2(-2.7,0.635) 3(-2.7,-0.635) 4(-2.7,-1.905)
  rect 4.6x4.7 smd: mb(1.3,0)
  silkscreen extent -2.77,2.66 -2.52,2.9, body extent -2.95,-2.5 3.05,2.5, height 1.25
"MSOP10 (RM-10)" [mm] "AD5314WARMZ-REEL7"
  oval 0.85x0.25 smd: 1(-2.225,1) 2(-2.225,0.5) 3(-2.225,0) 4(-2.225,-0.5) 5(-2.225,-1) 6(2.225,-1) 7(2.225,-0.5) 8(2.225,0) 9(2.225,0.5) 10(2.225,1)
  silkscreen extent -2.35,-1.55 1.15,1.8, body extent -1.55,-1.55 1.55,1.55, height 1.1
MSOP-8 [mm] "MSOP, 8-Leads, Body 3.00x3.00mmPitch 0.65mm, IPC MSOP65P490X110-8N, Medium Density, LTC2053, AD8495, LT6100HMS8PBF"
  rect 0.889x0.42 smd: 1(-2.105,0.975) 2(-2.105,0.325) 3(-2.105,-0.325) 4(-2.105,-0.975) 5(2.106,-0.975) 6(2.106,-0.325) 7(2.106,0.325) 8(2.106,0.975)
  silkscreen extent -2.23,-1.55 1.15,1.86, body extent -1.55,-1.55 1.55,1.55, height 1.1
"PTC Fuse 2920/07351" [mm] "Chip PTC Fuse, 2-Leads, Body 7.36x5.12mm, IPC Medium Density"
  rect 3.5x5.45 smd: 1(-2.625,0) 2(2.625,0)
  silkscreen extent -0.5,-2.62 0.5,2.62, body extent -3.99,-2.72 3.99,2.72, height 1.25
"RES 0402/1005" [mm] "Chip Resistor, 2-Leads, Body 1.0x0.5mm, IPC Medium Density"
  rect 0.75x0.6 smd: 1(-0.575,0) 2(0.575,0)
  silkscreen extent -1.14,-0.51 1.14,0.51, body extent -0.5,-0.25 0.5,0.25, height 0.35
"RES 0603/1608" [mm] "Chip Resistor, 2-Leads, Body 1.60x0.80mm, IPC Medium Density"
  rect 0.85x0.95 smd: 1(-0.65,0) 2(0.65,0)
  silkscreen extent -1.27,-0.7 1.27,0.7, body extent -0.8,-0.4 0.8,0.4, height 0.45
"RES 0805/2012" [mm] "Chip Resistor, 2-Leads, Body 2.00x1.25mm, IPC Medium Density"
  rect 1.15x1.35 smd: 1(-0.875,0) 2(0.875,0)
  silkscreen extent -1.7,-0.9 1.7,0.9, body extent -0.95,-0.62 1.05,0.63, height 0.6
"RES 2010/5025" [mm] "Current Sense Resistor, 2-Leads, Body 5.05x2.55mm, IPC Medium Density"
  rect 2.25x2.6 smd: 1(-1.775,0) 2(1.775,0)
  silkscreen extent -0.25,-1.2 0.25,1.2, body extent -2.55,-1.3 2.55,1.3, height 0.65
SO-20 [mm] "LT1161ISWPBF"
  rect 1.9x0.6 smd: 1(-4.75,5.715) 2(-4.75,4.445) 3(-4.75,3.175) 4(-4.75,1.905) 5(-4.75,0.635) 6(-4.75,-0.635) 7(-4.75,-1.905) 8(-4.75,-3.175) 9(-4.75,-4.445) 10(-4.75,-5.715) 11(4.75,-5.715) 12(4.75,-4.445) 13(4.75,-3.175) 14(4.75,-1.905) 15(4.75,-0.635) 16(4.75,0.635) 17(4.75,1.905) 18(4.75,3.175) 19(4.75,4.445) 20(4.75,5.715)
  silkscreen extent -4.87,-6.5 3.4,6.69, body extent -3.8,-6.5 3.8,6.5, height 2.65
SOD123F [mm] "SODFL, 2-Leads, Body 1.80x3.50mm, IPC Low Density"
  rect 1.35x1.45 smd: 1(-1.475,0) 2(1.475,0)
  silkscreen extent -0.38,-0.76 1.75,1.5, body extent -1.75,-0.95 1.75,0.95, height 1.15
SOIC-8 [mm] "SOIC, 8-Leads, Body 4.90x3.90mm, Pitch 1.27mm, IPC Medium Density"
  oval 1.45x0.6 smd: 1(-2.725,1.905) 2(-2.725,0.635) 3(-2.725,-0.635) 4(-2.725,-1.905) 5(2.725,-1.905) 6(2.725,-0.635) 7(2.725,0.635) 8(2.725,1.905)
  silkscreen extent -2.85,-2.5 1.6,2.88, body extent -3,-2.5 3,2.5, height 1.75
SOIC-16-NB [mm] "MMPQ3904, DG409DY-E3"
  oval 1.45x0.6 smd: 1(-2.725,4.445) 2(-2.725,3.175) 3(-2.725,1.905) 4(-2.725,0.635) 5(-2.725,-0.635) 6(-2.725,-1.905) 7(-2.725,-3.175) 8(-2.725,-4.445) 9(2.725,-4.445) 10(2.725,-3.175) 11(2.725,-1.905) 12(2.725,-0.635) 13(2.725,0.635) 14(2.725,1.905) 15(2.725,3.175) 16(2.725,4.445)
  silkscreen extent -2.85,-5 1.6,5.42, body extent -2,-5 2,5, height 1.75
SOT23-3 [mm] "SOT23, 3-Leads, Body 2.92x2.37mm, Pitch 0.95mm, IPC Medium Density, NUP2105L"
  rect 0.9x0.8 smd: 1(-1,0.95) 2(-1,-0.95) 3(1,0)
  silkscreen extent -1.12,-1.5 0.7,2.03, body extent -0.7,-1.52 0.7,1.52, height 1.11
SOT23-5 [mm] "SOT23, 5-Leads, Body 2.90x2.80mm, Pitch 0.95mm, IPC Medium Density, LP5907-3.3"
  rect 1x0.6 smd: 1(-1.375,0.95) 2(-1.375,0) 3(-1.375,-0.95) 4(1.375,-0.95) 5(1.375,0.95)
  silkscreen extent -1.5,-1.55 0.5,1.92, body extent -0.88,-1.52 0.87,1.53, height 1.45
"SOT-23 (TO-236)" [mm]
  rect 0.9x0.8 smd: 1(-1,0.95) 2(-1,-0.95) 3(1,0)
  silkscreen extent -1.13,-1.46 0.65,2.02, body extent -0.65,-1.46 0.65,1.46, height 1.11
SSOP-28 [mm] "SOP68P780X200-28N ,SOP, 28-Leads, Body 10.20x5.30mm, Pitch 0.68mm, IPC Medium Density, FT232RL"
  oval 1.65x0.5 smd: 1(-3.625,4.394) 2(-3.625,3.718) 3(-3.625,3.042) 4(-3.625,2.366) 5(-3.625,1.69) 6(-3.625,1.014) 7(-3.625,0.338) 8(-3.625,-0.338) 9(-3.625,-1.014) 10(-3.625,-1.69) 11(-3.625,-2.366) 12(-3.625,-3.042) 13(-3.625,-3.718) 14(-3.625,-4.394) 15(3.625,-4.394) 16(3.625,-3.718) 17(3.625,-3.042) 18(3.625,-2.366) 19(3.625,-1.69) 20(3.625,-1.014) 21(3.625,-0.338) 22(3.625,0.338) 23(3.625,1.014) 24(3.625,1.69) 25(3.625,2.366) 26(3.625,3.042) 27(3.625,3.718) 28(3.625,4.394)
  silkscreen extent -3.75,-5.25 2.4,5.32, body extent -2.8,-5.25 2.8,5.25, height 2
"SUPERSEAL 60POS 90Deg" [mm]
  round 2.2 hole 1.3: A1(7.25,14.5) A2(10.25,14.5) A3(13.25,14.5) A4(16.25,14.5) A5(19.25,14.5) A6(22.25,14.5) A7(25.25,14.5) A8(28.25,14.5) A9(31.25,14.5) A10(8.75,12) A11(11.75,12) A12(14.75,12) A13(17.75,12) A14(20.75,12) A15(23.75,12) A16(26.75,12) A17(29.75,12) A18(8.75,9) A19(11.75,9) A20(14.75,9) A21(17.75,9) A22(20.75,9) A23(23.75,9) A24(26.75,9) A25(29.75,9) A26(7.25,6.5) A27(10.25,6.5) A28(13.25,6.5) A29(16.25,6.5) A30(19.25,6.5) A31(22.25,6.5) A32(25.25,6.5) A33(28.25,6.5) A34(31.25,6.5) B1(45.75,14.5) B2(48.75,14.5) B3(51.75,14.5) B4(54.75,14.5) B5(57.75,14.5) B6(60.75,14.5) B7(63.75,14.5) B8(47.25,12) B9(50.25,12) B10(53.25,12) B11(56.25,12) B12(59.25,12) B13(62.25,12) B14(47.25,9) B15(50.25,9) B16(53.25,9) B17(56.25,9) B18(59.25,9) B19(62.25,9) B20(45.75,6.5) B21(48.75,6.5) B22(51.75,6.5) B23(54.75,6.5) B24(57.75,6.5) B25(60.75,6.5) B26(63.75,6.5)
  round 3.3 hole 3.3: CH(38.5,0) LH(0,0) RH(71,0)
  silkscreen extent -3.5,-3.5 74.5,17, body extent -3.5,-19.5 74.5,17, height 28.15
TECO-1981568-5_V [mm] "SMD, 5-Leads, Body 8x5.9mm, Pitch 0.65mm"
  rect 0.4x1.35 smd: 1(-1.3,0) 2(-0.65,0) 3(0,0) 4(0.65,0) 5(1.3,0)
  rect 1.6x1.4 smd: 6(-3.2,-0.225) 7(3.2,-0.225)
  rect 1.45x1.3 smd: 8(-3.425,-2.675) 9(3.425,-2.675)
  rect 1.9x1.9 smd: 10(-1.2,-2.675) 11(1.2,-2.675)
  silkscreen extent -4,-5.62 4,1.12, body extent -4,-5.63 4,0.28, height 3
TO-277 [mm] "DFN, 3-Leads, Body 4.44x5.91mm, Pitch 3.68mm, IPC Medium Density, FSV20100V"
  rect 1.3x1.45 smd: 1(-2.794,1.016) 2(-2.794,-1.016)
  rect 4.9x4.15 smd: 3(0.913,0)
  silkscreen extent -3.12,2.67 -3.03,2.76, body extent -3.3,-2.31 3.56,2.32, height 1.2
TQFP64 [mm] "TSQFP, 64-Leads, Body 10.00x10.00mm, Pitch 0.50mm, IPC Medium Density, MKE18F512VLH16"
  rect 1.35x0.3 smd: 1(-5.75,3.75) 2(-5.75,3.25) 3(-5.75,2.75) 4(-5.75,2.25) 5(-5.75,1.75) 6(-5.75,1.25) 7(-5.75,0.75) 8(-5.75,0.25) 9(-5.75,-0.25) 10(-5.75,-0.75) 11(-5.75,-1.25) 12(-5.75,-1.75) 13(-5.75,-2.25) 14(-5.75,-2.75) 15(-5.75,-3.25) 16(-5.75,-3.75) 33(5.75,-3.75) 34(5.75,-3.25) 35(5.75,-2.75) 36(5.75,-2.25) 37(5.75,-1.75) 38(5.75,-1.25) 39(5.75,-0.75) 40(5.75,-0.25) 41(5.75,0.25) 42(5.75,0.75) 43(5.75,1.25) 44(5.75,1.75) 45(5.75,2.25) 46(5.75,2.75) 47(5.75,3.25) 48(5.75,3.75)
  rect 0.3x1.35 smd: 17(-3.75,-5.75) 18(-3.25,-5.75) 19(-2.75,-5.75) 20(-2.25,-5.75) 21(-1.75,-5.75) 22(-1.25,-5.75) 23(-0.75,-5.75) 24(-0.25,-5.75) 25(0.25,-5.75) 26(0.75,-5.75) 27(1.25,-5.75) 28(1.75,-5.75) 29(2.25,-5.75) 30(2.75,-5.75) 31(3.25,-5.75) 32(3.75,-5.75) 49(3.75,5.75) 50(3.25,5.75) 51(2.75,5.75) 52(2.25,5.75) 53(1.75,5.75) 54(1.25,5.75) 55(0.75,5.75) 56(0.25,5.75) 57(-0.25,5.75) 58(-0.75,5.75) 59(-1.25,5.75) 60(-1.75,5.75) 61(-2.25,5.75) 62(-2.75,5.75) 63(-3.25,5.75) 64(-3.75,5.75)
  silkscreen extent -5.87,-4.68 4.67,4.67, body extent -5,-5 5,5, height 1.6
XG8T-0231 [mm] "3 pin header"
  round 1.4 hole 0.8: 1(0,0) 2(2.54,0)

## Part data
C1: library part 943, Dielectric=Ceramic, Manufacturer_id=1, Package="CAP 0603/1608", Voltage_Rating=50V, Created_By="Nick Mah", Created_Date=10/20/2018, Drawer_id=1, idCapacitor=943, Name="Cap_0.10uf_50V_CAP 0603/1608"
C2: library part 929, Dielectric=Ceramic, Manufacturer_id=1, Package="CAP 0603/1608", Voltage_Rating=50V, Created_By="Nick Mah", Created_Date=10/20/2018, Drawer_id=1, idCapacitor=929, Name="Cap_4700pf_50V_CAP 0603/1608"
C3: library part 223, Dielectric=Ceramic, Manufacturer_id=1, Package="CAP 0603/1608", Voltage_Rating=16V, Created_By="Nick Mah", Created_Date=10/20/2018, Drawer_id=1, idCapacitor=223, Name="Cap_0.10uf_16V_CAP 0603/1608"
C4 C6 C24 C25 C26: library part 583, Dielectric=Ceramic, Manufacturer_id=1, Package="CAP 0603/1608", Voltage_Rating=25V, Created_By="Nick Mah", Created_Date=10/20/2018, Drawer_id=1, idCapacitor=583, Name="Cap_0.10uf_25V_CAP 0603/1608"
C5: library part 529, Dielectric=Ceramic, Manufacturer_id=1, Package="CAP 0603/1608", Voltage_Rating=25V, Created_By="Nick Mah", Created_Date=10/20/2018, Drawer_id=1, idCapacitor=529, Name="Cap_100pf_25V_CAP 0603/1608"
C7 C8 C9 C10 C11 C12 C13 C14 C15 C16 C17 C18: library part 57, Dielectric=Ceramic, Manufacturer_id=1, Package="CAP 0402/1005", Voltage_Rating=16V, Created_By="Nick Mah", Created_Date=10/20/2018, Drawer_id=1, idCapacitor=57, Name="Cap_220pf_16V_CAP 0402/1005"
C19 C20: library part 235, Dielectric=Ceramic, Manufacturer_id=1, Package="CAP 0603/1608", Voltage_Rating=16V, Created_By="Nick Mah", Created_Date=10/20/2018, Drawer_id=1, idCapacitor=235, Name="Cap_10uf_16V_CAP 0603/1608"
C21 C22: library part 231, Dielectric=Ceramic, Manufacturer_id=1, Package="CAP 0603/1608", Voltage_Rating=16V, Created_By="Nick Mah", Created_Date=10/20/2018, Drawer_id=1, idCapacitor=231, Name="Cap_2.2uf_16V_CAP 0603/1608"
C23: library part 689, Dielectric=Ceramic, Manufacturer_id=1, Package="CAP 0805/2012", Voltage_Rating=25V, Created_By="Nick Mah", Created_Date=10/20/2018, Drawer_id=1, idCapacitor=689, Name="Cap_4700pf_25V_CAP 0805/2012"
D1: library part 7, "ESD Protection Diode", Manufacturer_id=1, Package=SOT-23, Power=350W, Supplier1PartNo=NUP1105LT1GOSCT-ND, ComponentLink1URL=https://www.digikey.com/product-detail/en/on-semiconductor/NUP1105LT1G/NUP1105LT1GOSCT-ND/2122067, Drawer_id=1, Ic=8A, idDiode=7, Link=https://www.digikey.com/product-detail/en/on-semiconductor/NUP1105LT1G/NUP1105LT1GOSCT-ND/2122067, MfrPartNo=NUP1105LT1G, Name=SOT-23_350W_Zener, Num_Circuits=1, Supplier1=Digikey, Type=Zener
D2 D3 D4: library part 14, "DIODE ZENER ARRAY 4.7V SOT23-3", Manufacturer_id=1, MfrPartNo=AZ23C4V7-7-F, Package=SOT23-3, Power=300mW, Created_By="Angel Delgado", Drawer_id=1, idDiode=14, Link=https://www.digikey.com/product-detail/en/diodes-incorporated/AZ23C4V7-7-F/AZ23C4V7-FDICT-ND/815309, Name=AZ23C4V7-7-F, Num_Circuits=2, Supplier1=Digi-Key, Type="Zener Array"
D5: library part 2, "Diode Super Barrier 40V 1A Surface Mount SOD-123F", Manufacturer_id=1, MfrPartNo=1N5819HW1-7-F, Package=SOD-123, Power=40V, Supplier1PartNo=1N5819HW1-7-FDITR-ND, ComponentLink1Description=Datasheet, ComponentLink1URL=https://www.diodes.com/assets/Datasheets/1N5819HW1.pdf, Drawer_id=1, Ic=1A, idDiode=2, Link=https://www.digikey.com/product-detail/en/diodes-incorporated/1N5819HW1-7-F/1N5819HW1-7-FDITR-ND/5768523, Name=1N5819, Num_Circuits=1, Supplier1=Digi-Key, Type="Super Barrier"
D6: library part 4, "100V Reverse DC Voltage", Manufacturer_id=1, MfrPartNo=1N4148W-7-F, Package=SOD123, Drawer_id=1, Ic="300 mA", idDiode=4, Link=https://www.digikey.com/product-detail/en/diodes-incorporated/1N4148W-7-F/1N4148W-FDICT-ND/815280, Name=1N4148W-7-F
D7: library part 10, "Zener Diode 14V 500mW ±5% Surface Mount SOD-123", Manufacturer_id=8, Package=SOD-123, Power=500mW, Supplier1PartNo=DDZ9701-7DICT-ND, ComponentLink1Description=Datasheet, ComponentLink1URL=https://www.diodes.com/assets/Datasheets/ds30410.pdf, Drawer_id=1, idDiode=10, Link=https://www.digikey.com/product-detail/en/diodes-incorporated/DDZ9701-7/DDZ9701-7DICT-ND/3877402, MfrPartNo=DDZ9701-7, Name=DDZ9701, Num_Circuits=1, Supplier1=Digi-Key, Type=Zener
D8: library part 11, Manufacturer_id=1, MfrPartNo=FSV20100V, Package=TO-277, Supplier1PartNo=FSV20100VCT-ND, ComponentLink1Description=Datasheet, ComponentLink1URL=https://www.fairchildsemi.com/datasheets/FS/FSV20100V.pdf, Drawer_id=1, idDiode=11, Link=https://www.digikey.com/product-detail/en/on-semiconductor/FSV20100V/FSV20100VCT-ND/5306682, Name=FSV20100V, Type=Schottky
D9 LED2: library part 2, Manufacturer_id=1, Package=0805, Brightness=7mcd, Drawer_id=1, Id=20mA, idLED=2, Link=https://www.digikey.com/product-detail/en/visual-communications-company-vcc/CMD17-21VGD-TR8/L62505CT-ND/254936, Name=CMD17_0805_GREEN, Vf=2.1V
D10: library part 1, Package=0805, Drawer_id=1, idLED=1, Manufacturer_id=1, Name=LED_0805_RED, Vf=0.7V
DAC1: library part 25, "10bit 4 channel DAC", Manufacturer_id=1, MfrPartNo=AD5314ARMZ, Package=MSOP-10, Drawer_id=1, idFuse=3, idIC_Misc=25, Link=https://www.digikey.com/product-detail/en/analog-devices-inc/AD5314ARMZ/AD5314ARMZ-ND/653841, Name=AD5314ARMZ, Num_Circuits=4, Type=DAC, Vin(Max)=5.5, Vin(Min)=2.5
F1 F2 U10: library part 3, Manufacturer_id=1, Drawer_id=1
  F1 F2: idFuse=3, Name="3568 Mini Fuse Holder"
  U10: Created_By=Kyle, idIC_Interface=3, Link=https://www.digikey.com/product-detail/en/ftdi-future-technology-devices-international-ltd/FT232RL-REEL/768-1007-1-ND/1836402, MfrPartNo=FT232RL, Name="USB FTDI", Protocol=UART, Vin(Max)=5.25, Vin(Min)=3.3
IC1 IC2 IC3 IC4: library part 4, Manufacturer_id=1, MfrPartNo=LT1716IS5#PBF, Drawer_id=1, idOp_Amp=4, Name="Op-Amp LT1716", Num_Circuits=1
IC5: library part 20, idIC_Misc=20
IC6 IC7 IC8: library part 16, Manufacturer_id=1, Created_By="Eunice Bernardo", Created_Date=10/27/2018, Drawer_id=1, idIC_Misc=16, Name="LT1161ISWPBF MOSFET Driver"
IC9 IC10 IC11 IC12 IC13 IC14 IC15 IC16 U3 U4 U5 U6: library part 13, Manufacturer_id=1, Package=MS8, Created_By=Eddy, Created_Date=10/17/2018, Drawer_id=1, idIC_Misc=13, Name="LT6100 Current Sense Amp"
IC17: library part 10, "IC VREF SERIES 5V 8SOIC", Manufacturer_id=1, MfrPartNo=MAX6350CSA+, Package=SOIC-8, Created_By="Albert Panuco", Drawer_id=1, idPMIC_Lin=10, Link=https://www.digikey.com/product-detail/en/maxim-integrated/MAX6350CSA/MAX6350CSA-ND/1867176, Name=MAX6350CSA+_5V_Ref, Num_Outputs=1, Output_Config=5V, Updated_By="Albert Panuco", Vin(Max)=40V, Vout(Max)=12V
J1: library part 5, "USB Micro Type B", Manufacturer_id=1, ComponentLink1Description=Datasheet, Created_By=Aiku, Created_Date=10/20/2018, Drawer_id=1, idConn=5, Link=https://www.mouser.com/ProductDetail/TE-Connectivity-AMP/1981568-1?qs=sGAEpiMZZMulM8LPOQ%252bykzEIUPbUCiSfqsfxH3Oq%252bYo%3d, MfrPartNo=1981568-1, Name="TE USB Micro", Num_Contacts=5, Supplier1=TE
LED1: library part 2, Manufacturer_id=1, Brightness=35mcd, Drawer_id=1, Id=20mA, idLED=2, Name=LED_0805_GREEN, Vf=2V
M1 M2 M3 T1 T2 T3 T4 T5 T6 T7 T8 T9 T10 T11 T12 T13 T14 T15 T16 T17: library part 3, "N-Channel 25V 100A (Tc) 106W (Tc) Surface Mount LFPAK56, Power-SO8", Manufacturer_id=6, MfrPartNo=PSMN2R2-25YLC,115, Package=LFPAK-SO8, Supplier1PartNo=1727-5299-1-ND, ComponentLink1Description=Datasheet, ComponentLink1URL=https://assets.nexperia.com/documents/data-sheet/PSMN2R2-25YLC.pdf, Created_By=Nick, Drawer_id=1, Id=100A, idFETs=3, Link=https://www.digikey.com/product-detail/en/nexperia-usa-inc/PSMN2R2-25YLC115/1727-5299-1-ND/2674299, Name=PSMN2R2, Num_Circuits=1, Rds_On=2.5mOhm, Supplier1=Digi-Key, Vdss=25V, Vgs(Max)=20V, Vgs(typ)=10V
P1: library part 4, "2 row connector", Manufacturer_id=1, Voltage_Rating=None, ComponentLink1Description=Datasheet, Created_By=Aiku, Drawer_id=1, idConn=4, Link=https://www.digikey.com/product-detail/en/5103309-1/A33160-ND/1114898?utm_campaign=buynow&WT.z_cid=ref_octopart_dkc_buynow&utm_medium=aggregator&curr=usd&site=us&utm_source=octopart, MfrPartNo=5103309-1, Name=CONN_TE_2X5POS, Num_Contacts=10, Num_Rows=2, Pitch=2.54mm
"PTC Fuse1" "PTC Fuse2" "PTC Fuse3" "PTC Fuse4" "PTC Fuse5" "PTC Fuse6" "PTC Fuse7" "PTC Fuse8": library part 6, "Fuse", Manufacturer_id=1, MfrPartNo=2920L500/16MR, Created_By=Angel, Drawer_id=1, I_hold="5 A", I_max="40 A", I_trip="10 A", idFuse=6, LatestRevisionDate=17-Jul-2002, LatestRevisionNote="Re-released for DXP Platform.", Link=https://www.digikey.com/product-detail/en/littelfuse-inc/2920L500-16MR/F6136CT-ND/4147146, Name=2920L500/16MR, PackageDescription="Thru-Hole; 2 Leads", PackageReference=PIN-W2/E2.8, Published=8-Jun-2000, Publisher="Altium Limited", V_max="16 V"
Q1: library part 5, Manufacturer_id=1, Package=SOIC-16, Created_By="Angel Delgado", Drawer_id=1, hFE=75, Ic=200mA, idBJT=5, Link=https://www.mouser.com/ProductDetail/ON-Semiconductor-Fairchild/MMPQ3904?qs=sGAEpiMZZMshyDBzk1%2fWi8oN7VHZ91OkACYhS8H8agM%3d, MfrPartNo=MMPQ3904, Name=MMPQ3904, Num_Circuits=4, Type="NPN Array", Vce(Max)=40V
R1 R4 R7 R10 R23: library part 313, Manufacturer_id=1, Package=0603, Power=1/10W, Tolerance=1%, ComponentLink1Description=Datasheet, Created_By="Nick Mah", Created_Date=2018-10-20, Drawer_id=1, idResistor=313, Name=Res_10k_0603_1/10W_1%, Supplier 1=Digi-Key
R2 R5 R8 R11 R16: library part 529, Manufacturer_id=1, Package=0805, Power=1/10W, Tolerance=1%, ComponentLink1Description=Datasheet, Created_By="Nick Mah", Created_Date=2018-10-20, Drawer_id=1, idResistor=529, Name=Res_10k_0805_1/10W_1%, Supplier 1=Digi-Key
R3 R6 R9 R12: library part 300, Manufacturer_id=1, Package=0603, Power=1/10W, Tolerance=1%, ComponentLink1Description=Datasheet, Created_By="Nick Mah", Created_Date=2018-10-20, Drawer_id=1, idResistor=300, Name=Res_3.0k_0603_1/10W_1%, Supplier 1=Digi-Key
R13 R14: library part 1340, Manufacturer_id=1, Package=0603, Power=1/10W, Tolerance=5%, ComponentLink1Description=Datasheet, Created_By="Nick Mah", Created_Date=2018-10-20, Drawer_id=1, idResistor=1340, Name=Res_62_0603_1/10W_5%, Supplier 1=Digi-Key
R15: library part 2293, Manufacturer_id=1, Package=0603, Power=1/10W, Tolerance=10%, ComponentLink1Description=Datasheet, Created_By="Nick Mah", Created_Date=2018-10-20, Drawer_id=1, idResistor=2293, Name=Res_100_0603_1/10W_10%, Supplier 1=Digi-Key
R17 R18 R19 R20 R21 R22: library part 297, Manufacturer_id=1, Package=0603, Power=1/10W, Tolerance=1%, ComponentLink1Description=Datasheet, Created_By="Nick Mah", Created_Date=2018-10-20, Drawer_id=1, idResistor=297, Name=Res_2.2k_0603_1/10W_1%, Supplier 1=Digi-Key
R24: library part 1393, Manufacturer_id=1, Package=0603, Power=1/10W, Tolerance=5%, ComponentLink1Description=Datasheet, Created_By="Nick Mah", Created_Date=2018-10-20, Drawer_id=1, idResistor=1393, Name=Res_10k_0603_1/10W_5%, Supplier 1=Digi-Key
R25 R28 R31 R34: library part 2702, "Current Sense Resistor", Manufacturer_id=1, MfrPartNo=CSNL2010FT2L00, Package=2010, Power=1.5W, Supplier Part Number 1=Digi-Key, Tolerance=1%, ComponentLink1Description=Datasheet, Created_By=Angel, Drawer_id=1, idResistor=2702, Link=https://www.digikey.com/product-detail/en/stackpole-electronics-inc/CSNL2010FT2L00/CSNL2010FT2L00CT-ND/1788126, Name=Res_.002_2010_1.5W_1%, Supplier 1=Digi-Key
R26 R29 R32 R35 R38 R41 R44 R47 R50 R53 R56 R59: library part 2430, Manufacturer_id=1, Package=0805, Power=1/10W, Tolerance=10%, ComponentLink1Description=Datasheet, Created_By="Nick Mah", Created_Date=2018-10-20, Drawer_id=1, idResistor=2430, Name=Res_27k_0805_1/10W_10%, Supplier 1=Digi-Key
R27 R30 R33 R36 R39 R42 R45 R48 R51 R54 R57 R60: library part 97, Manufacturer_id=1, Package=0402, Power=1/10W, Tolerance=1%, ComponentLink1Description=Datasheet, Created_By="Nick Mah", Created_Date=2018-10-20, Drawer_id=1, idResistor=97, Name=Res_10k_0402_1/10W_1%, Supplier 1=Digi-Key
R37 R40 R43 R46 R49 R52 R55 R58: library part 2701, "Current Sense Resistor", Manufacturer_id=1, MfrPartNo=CSRN2010FK20L0, Package=2010, Power=1W, Supplier Part Number 1=Digi-Key, Tolerance=1%, ComponentLink1Description=Datasheet, Created_By=Angel, Drawer_id=1, idResistor=2701, Link=https://www.digikey.com/product-detail/en/stackpole-electronics-inc/CSRN2010FK20L0/CSRN2010FK20L0TR-ND/1646098, Name=Res_.02_2010_1W_1%, Supplier 1=Digi-Key
R61: library part 2432, Manufacturer_id=1, Package=0805, Power=1/10W, Tolerance=10%, ComponentLink1Description=Datasheet, Created_By="Nick Mah", Created_Date=2018-10-20, Drawer_id=1, idResistor=2432, Name=Res_39k_0805_1/10W_10%, Supplier 1=Digi-Key
R62: library part 2533, Manufacturer_id=1, Package=0805, Power=1/4W, Tolerance=10%, ComponentLink1Description=Datasheet, Created_By="Nick Mah", Created_Date=2018-10-20, Drawer_id=1, idResistor=2533, Name=Res_10k_0805_1/4W_10%, Supplier 1=Digi-Key
R63: library part 2413, Manufacturer_id=1, Package=0805, Power=1/10W, Tolerance=10%, ComponentLink1Description=Datasheet, Created_By="Nick Mah", Created_Date=2018-10-20, Drawer_id=1, idResistor=2413, Name=Res_1.0k_0805_1/10W_10%, Supplier 1=Digi-Key
R64: library part 2703, Manufacturer_id=1, Package=0805, Power=1/10W, Supplier Part Number 1=Digi-Key, Tolerance=0.5%, ComponentLink1Description=Datasheet, Drawer_id=1, idResistor=2703, Link=https://www.digikey.com/product-detail/en/susumu/RR1220P-1472-D-M/RR12P14.7KDCT-ND/1288245, Name=Res_14.7K_0805_1/10W_0.5%
R65: library part 553, Manufacturer_id=1, Package=0805, Power=1/10W, Tolerance=1%, ComponentLink1Description=Datasheet, Created_By="Nick Mah", Created_Date=2018-10-20, Drawer_id=1, idResistor=553, Name=Res_100k_0805_1/10W_1%, Supplier 1=Digi-Key
R66: library part 545, Manufacturer_id=1, Package=0805, Power=1/10W, Tolerance=1%, ComponentLink1Description=Datasheet, Created_By="Nick Mah", Created_Date=2018-10-20, Drawer_id=1, idResistor=545, Name=Res_47k_0805_1/10W_1%, Supplier 1=Digi-Key
R67: library part 497, Manufacturer_id=1, Package=0805, Power=1/10W, Tolerance=1%, ComponentLink1Description=Datasheet, Created_By="Nick Mah", Created_Date=2018-10-20, Drawer_id=1, idResistor=497, Name=Res_470_0805_1/10W_1%, Supplier 1=Digi-Key
R68 R69 R70 R71: library part 721, Manufacturer_id=1, Package=0805, Power=1/4W, Tolerance=1%, ComponentLink1Description=Datasheet, Created_By="Nick Mah", Created_Date=2018-10-20, Drawer_id=1, idResistor=721, Name=Res_1.0k_0805_1/4W_1%, Supplier 1=Digi-Key
U1: library part 5, Manufacturer_id=1, MfrPartNo=MCP2561, Package=SOIC-8, Created_By="Angel Delgado", Data_Rate=1Mbps, Drawer_id=1, idIC_Interface=5, Link=https://www.digikey.com/product-detail/en/microchip-technology/MCP2561T-E-SN/MCP2561T-E-SNCT-ND/5148846, Name="CAN Transceiver", Num_Circuits=1, Protocol=CAN, Type=Transceiver, Vin(Max)=5.5V, Vin(Min)=4.5V
U2: library part 1, Drawer_id=1, idMCU=1, Manufacturer_id=1, Name="MKE18F512VLH16 MCU"
U5: library part 6, Current_Rating=2A, Dropout_Voltage=0.7V, Manufacturer_id=1, MfrPartNo=BA50DD0WHFP-TR, Drawer_id=1, idPMIC_Lin=6, Link=https://www.mouser.com/ProductDetail/ROHM-Semiconductor/BA50DD0WHFP-TR?qs=4kLU8WoGk0sFpKnESpdNFg%3D%3D, Name="BA50DD0WHFP-TR Linear Voltage Regulator 5", Vin(Max)=33V, Vin(Min)=3V, Vout(Max)=5V
U8: library part 18, "Protected High Side MOSFET Driver", Manufacturer_id=1, Drawer_id=1, idIC_Misc=18, Name="LT1910 MOSFET Driver"
U9: library part 23, Manufacturer_id=1, MfrPartNo=MCP9701T-E/TT, Package=SOT23-3, Drawer_id=1, idFuse=3, idIC_Misc=23, Link=https://www.digikey.com/product-detail/en/microchip-technology/MCP9701T-E-TT/MCP9701T-E-TTCT-ND/1987446, Name=MCP970x, Vin(Max)=5.5V, Vin(Min)=3.1V
W1: library part 18, "Jumper headers", Manufacturer_id=1, MfrPartNo=XG8T-0231, ComponentLink1Description=Datasheet, Drawer_id=1, idConn=18, idFuse=3, Link=https://www.digikey.ca/product-detail/en/omron-electronics-inc-emc-div/XG8T-0231/XG8T-0231-ND/1829453, Name=XG8T-0231, Num_Contacts=2, Num_Rows=1, Pitch=".1 mm", Supplier1=Digi-Key
X1: library part 3, "90 Degree", Manufacturer_id=1, ComponentLink1Description=Datasheet, Drawer_id=1, idConn=3, Link=https://www.te.com/usa-en/product-3-6437285-2.html, MfrPartNo=3-6437285-2, Name="AMP Superseal 60POS 90Deg", Num_Contacts=60, Num_Rows=4, Pitch="3 mm"

## Free pads (board coordinates)
  round 200 hole 125: 2(5000,200) 3(200,200) 4(200,4800) 5(5000,4800)

## Via types
v1: diameter 30, hole 15, Top Layer to Bottom Layer, 376 vias
v2: diameter 96, hole 48, Top Layer to Bottom Layer, 6 vias
v3: diameter 20, hole 10, Top Layer to Bottom Layer, 3 vias
v4: diameter 100, hole 50, Top Layer to Bottom Layer, 2 vias
v5: diameter 96, hole 46, Top Layer to Bottom Layer, 1 vias
v6: diameter 35, hole 20, Top Layer to Bottom Layer, 1 vias
v7: diameter 40, hole 20, Top Layer to Bottom Layer, 1 vias